# Altium PCB ECTU_PCB.PcbDoc (part 1 of 3)
Units mm, origin at the board's own origin, x right, y up, seen from the top; angles counter-clockwise.
Board outline 155 x 102 mm, 4 copper layers (Top Layer, Mid Top, Mid Bottom, Bottom Layer), stack 0.603 mm thick; 266 components, 187 nets, 917 pads, 241 vias.
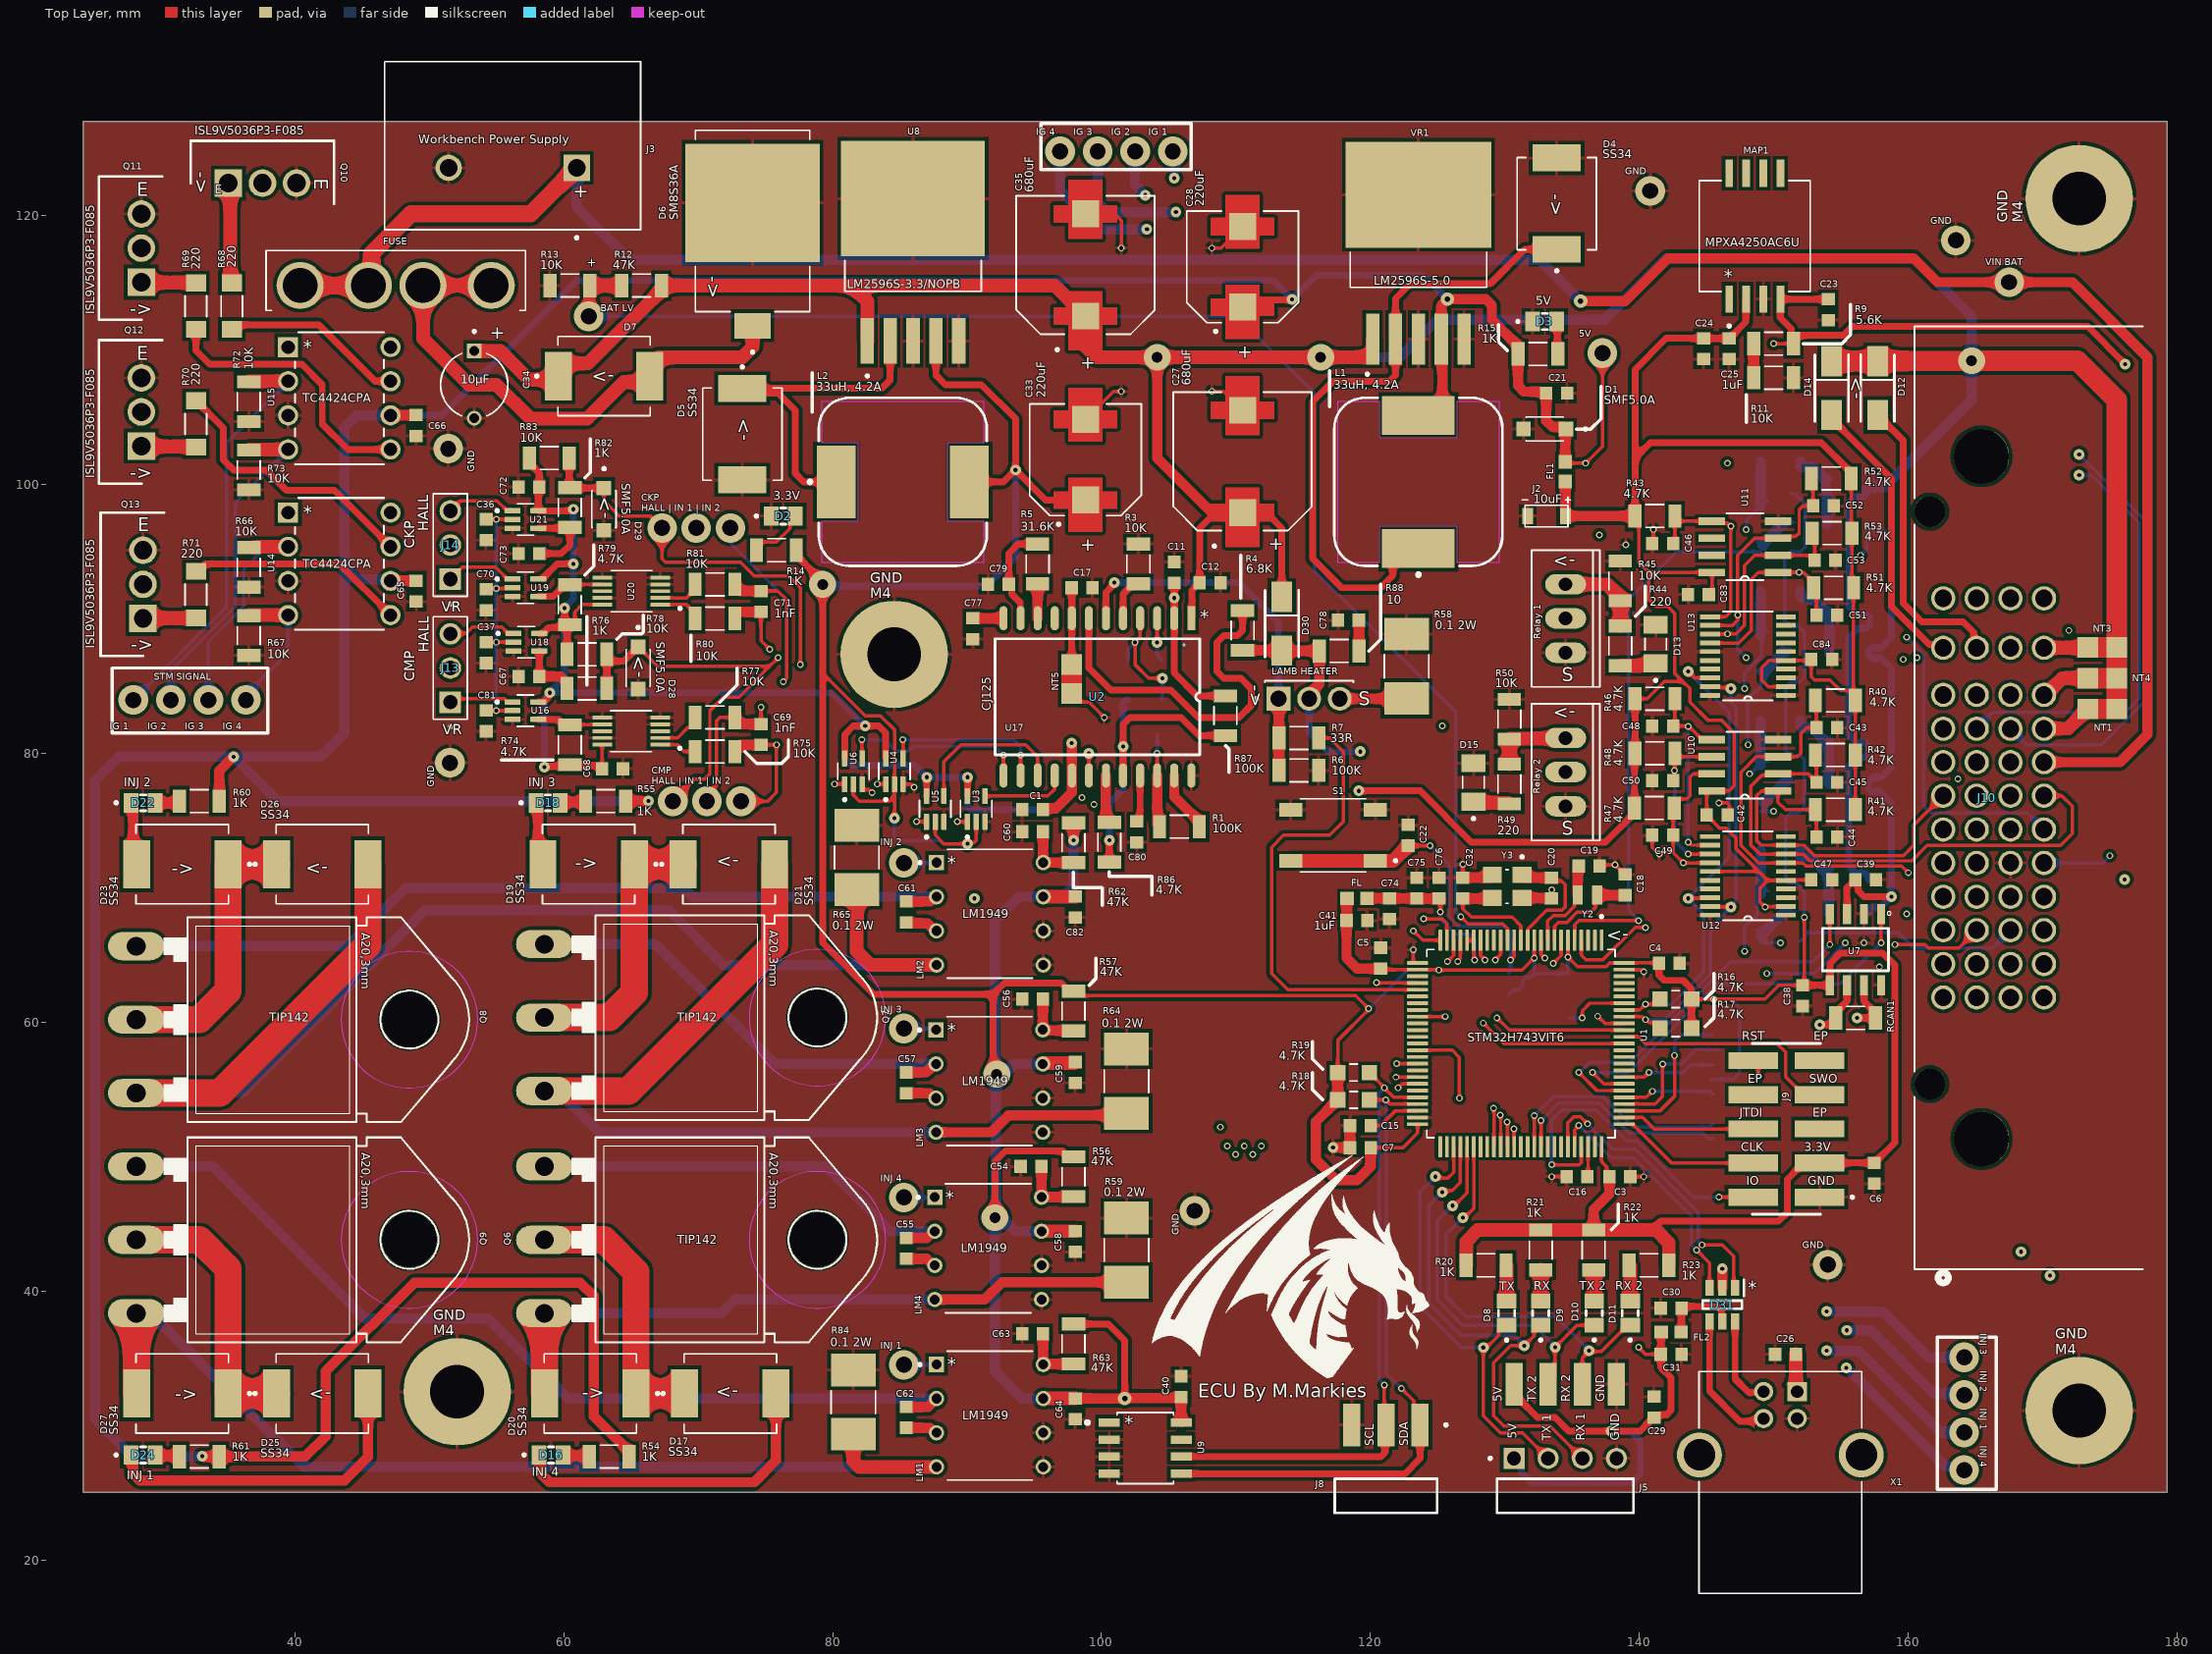
[diagram p0: Top Layer view]
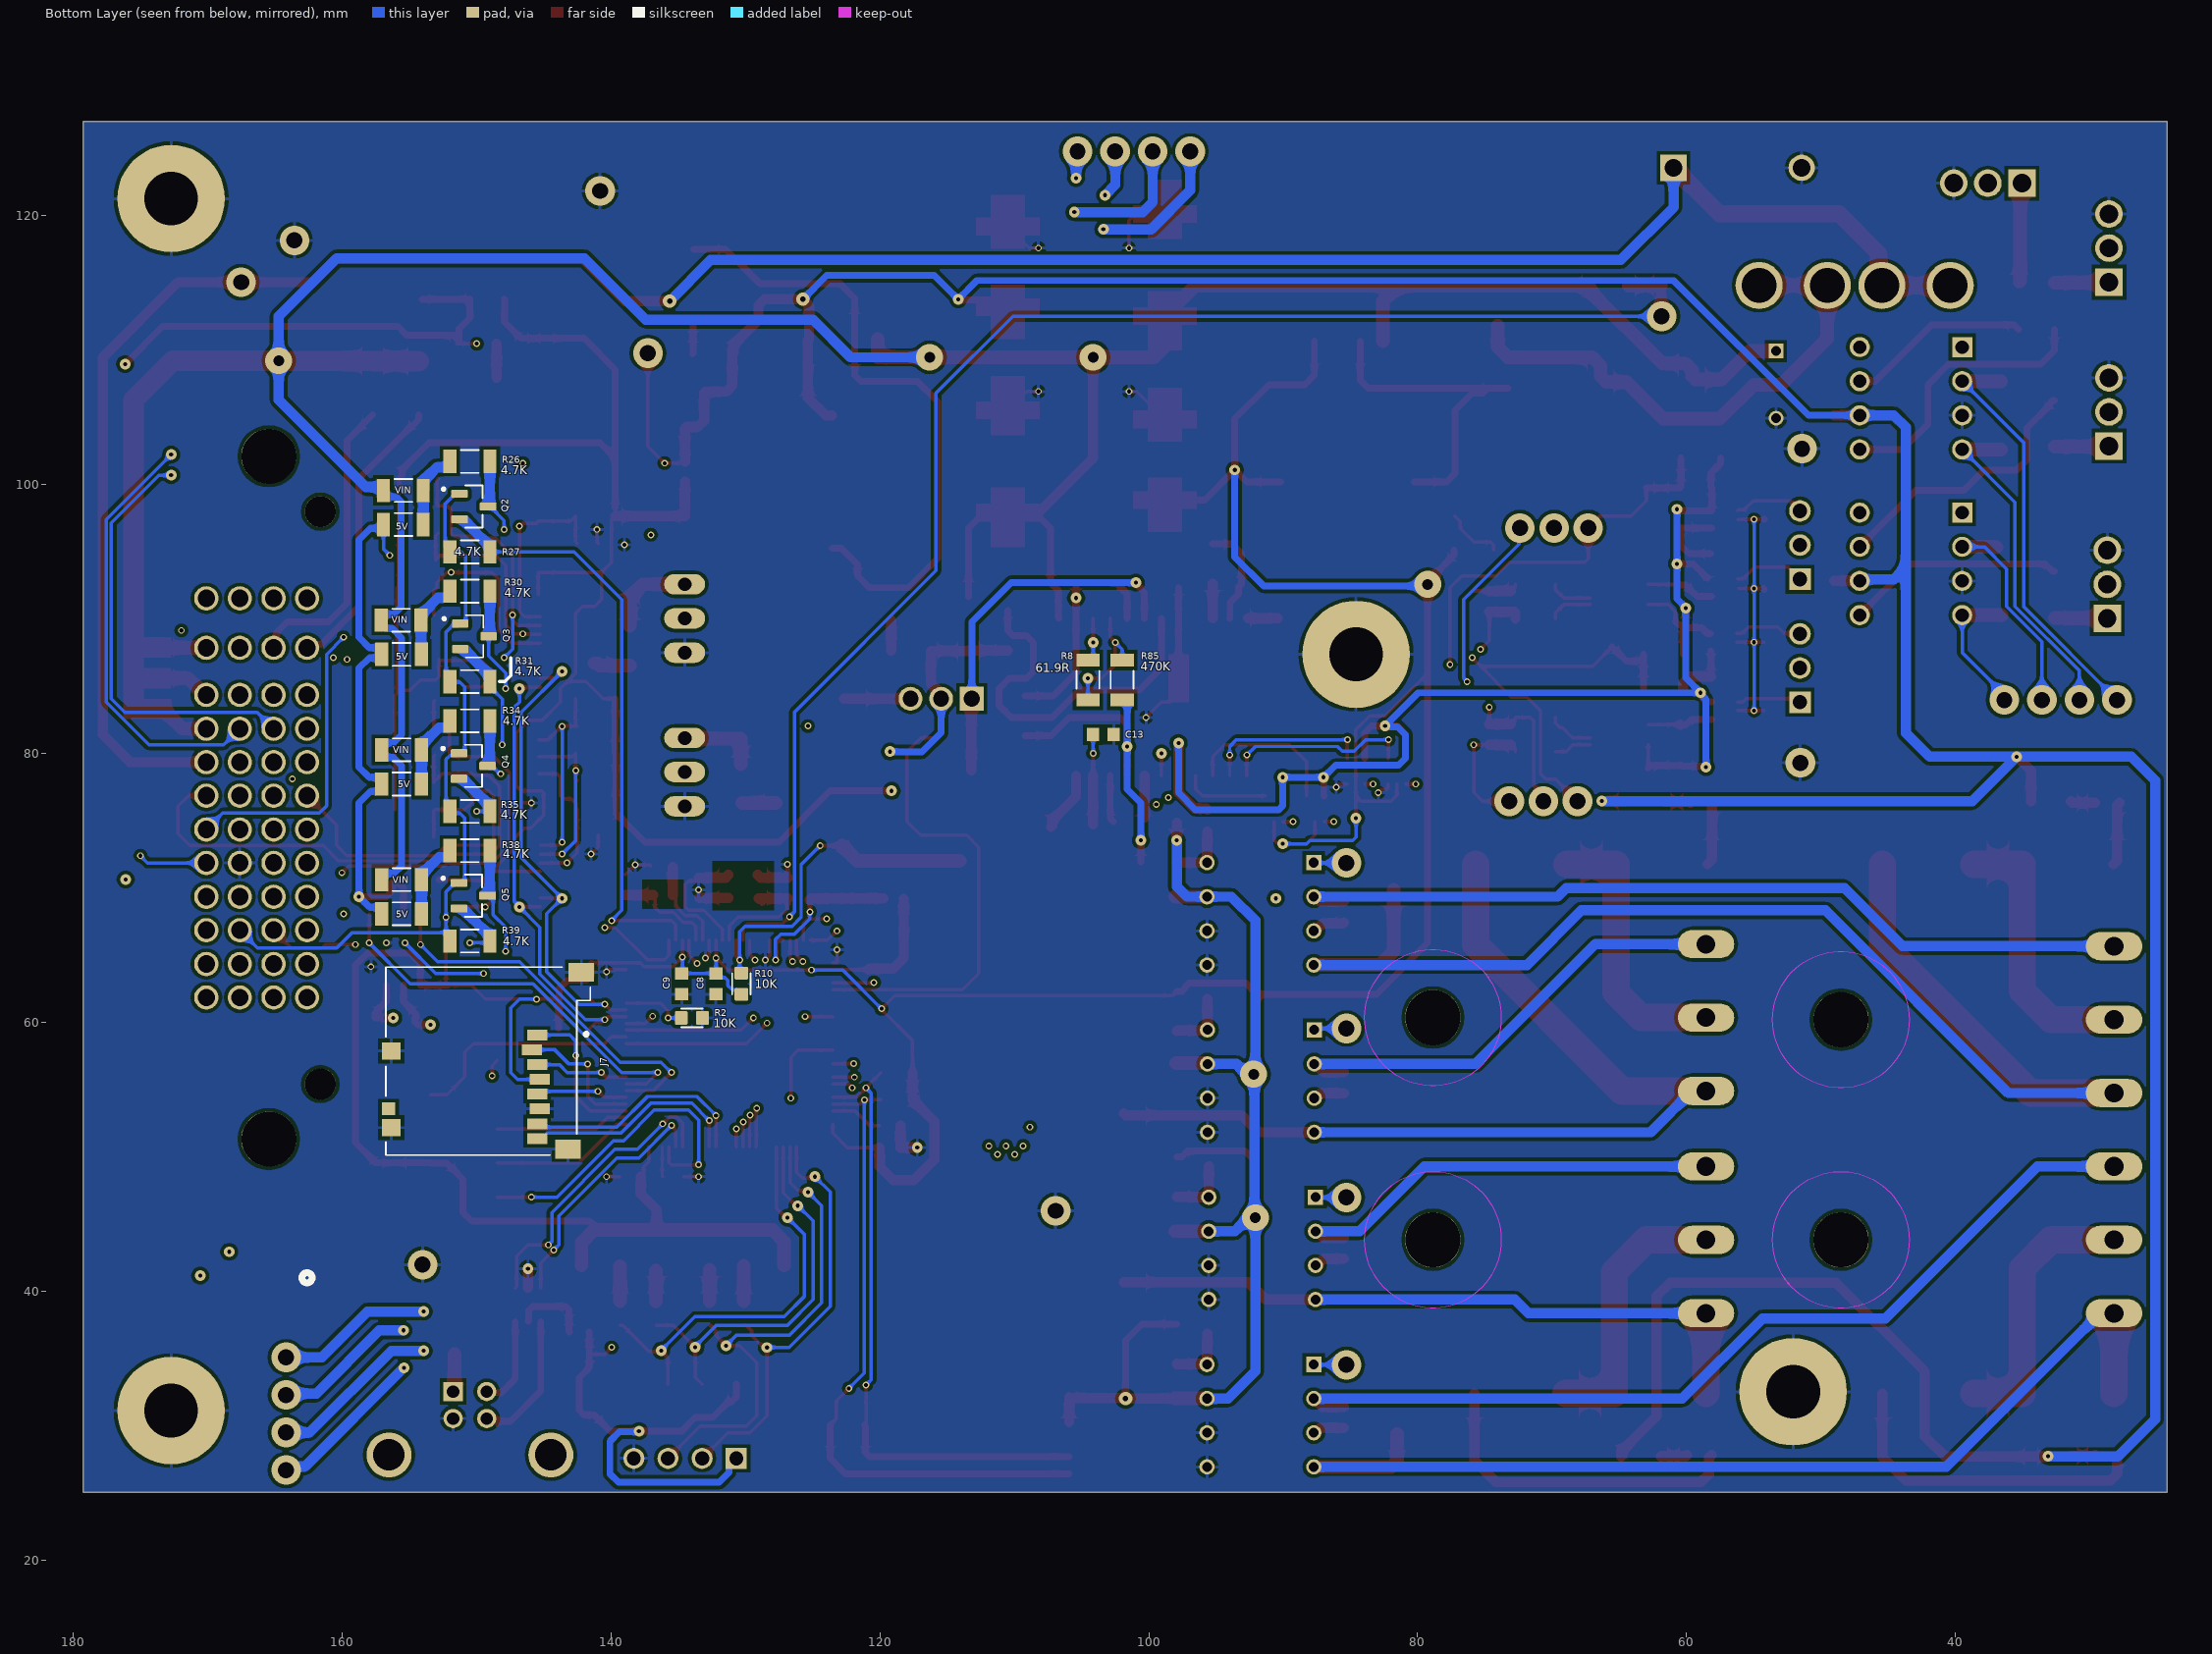
[diagram p1: Bottom Layer view, seen from below]
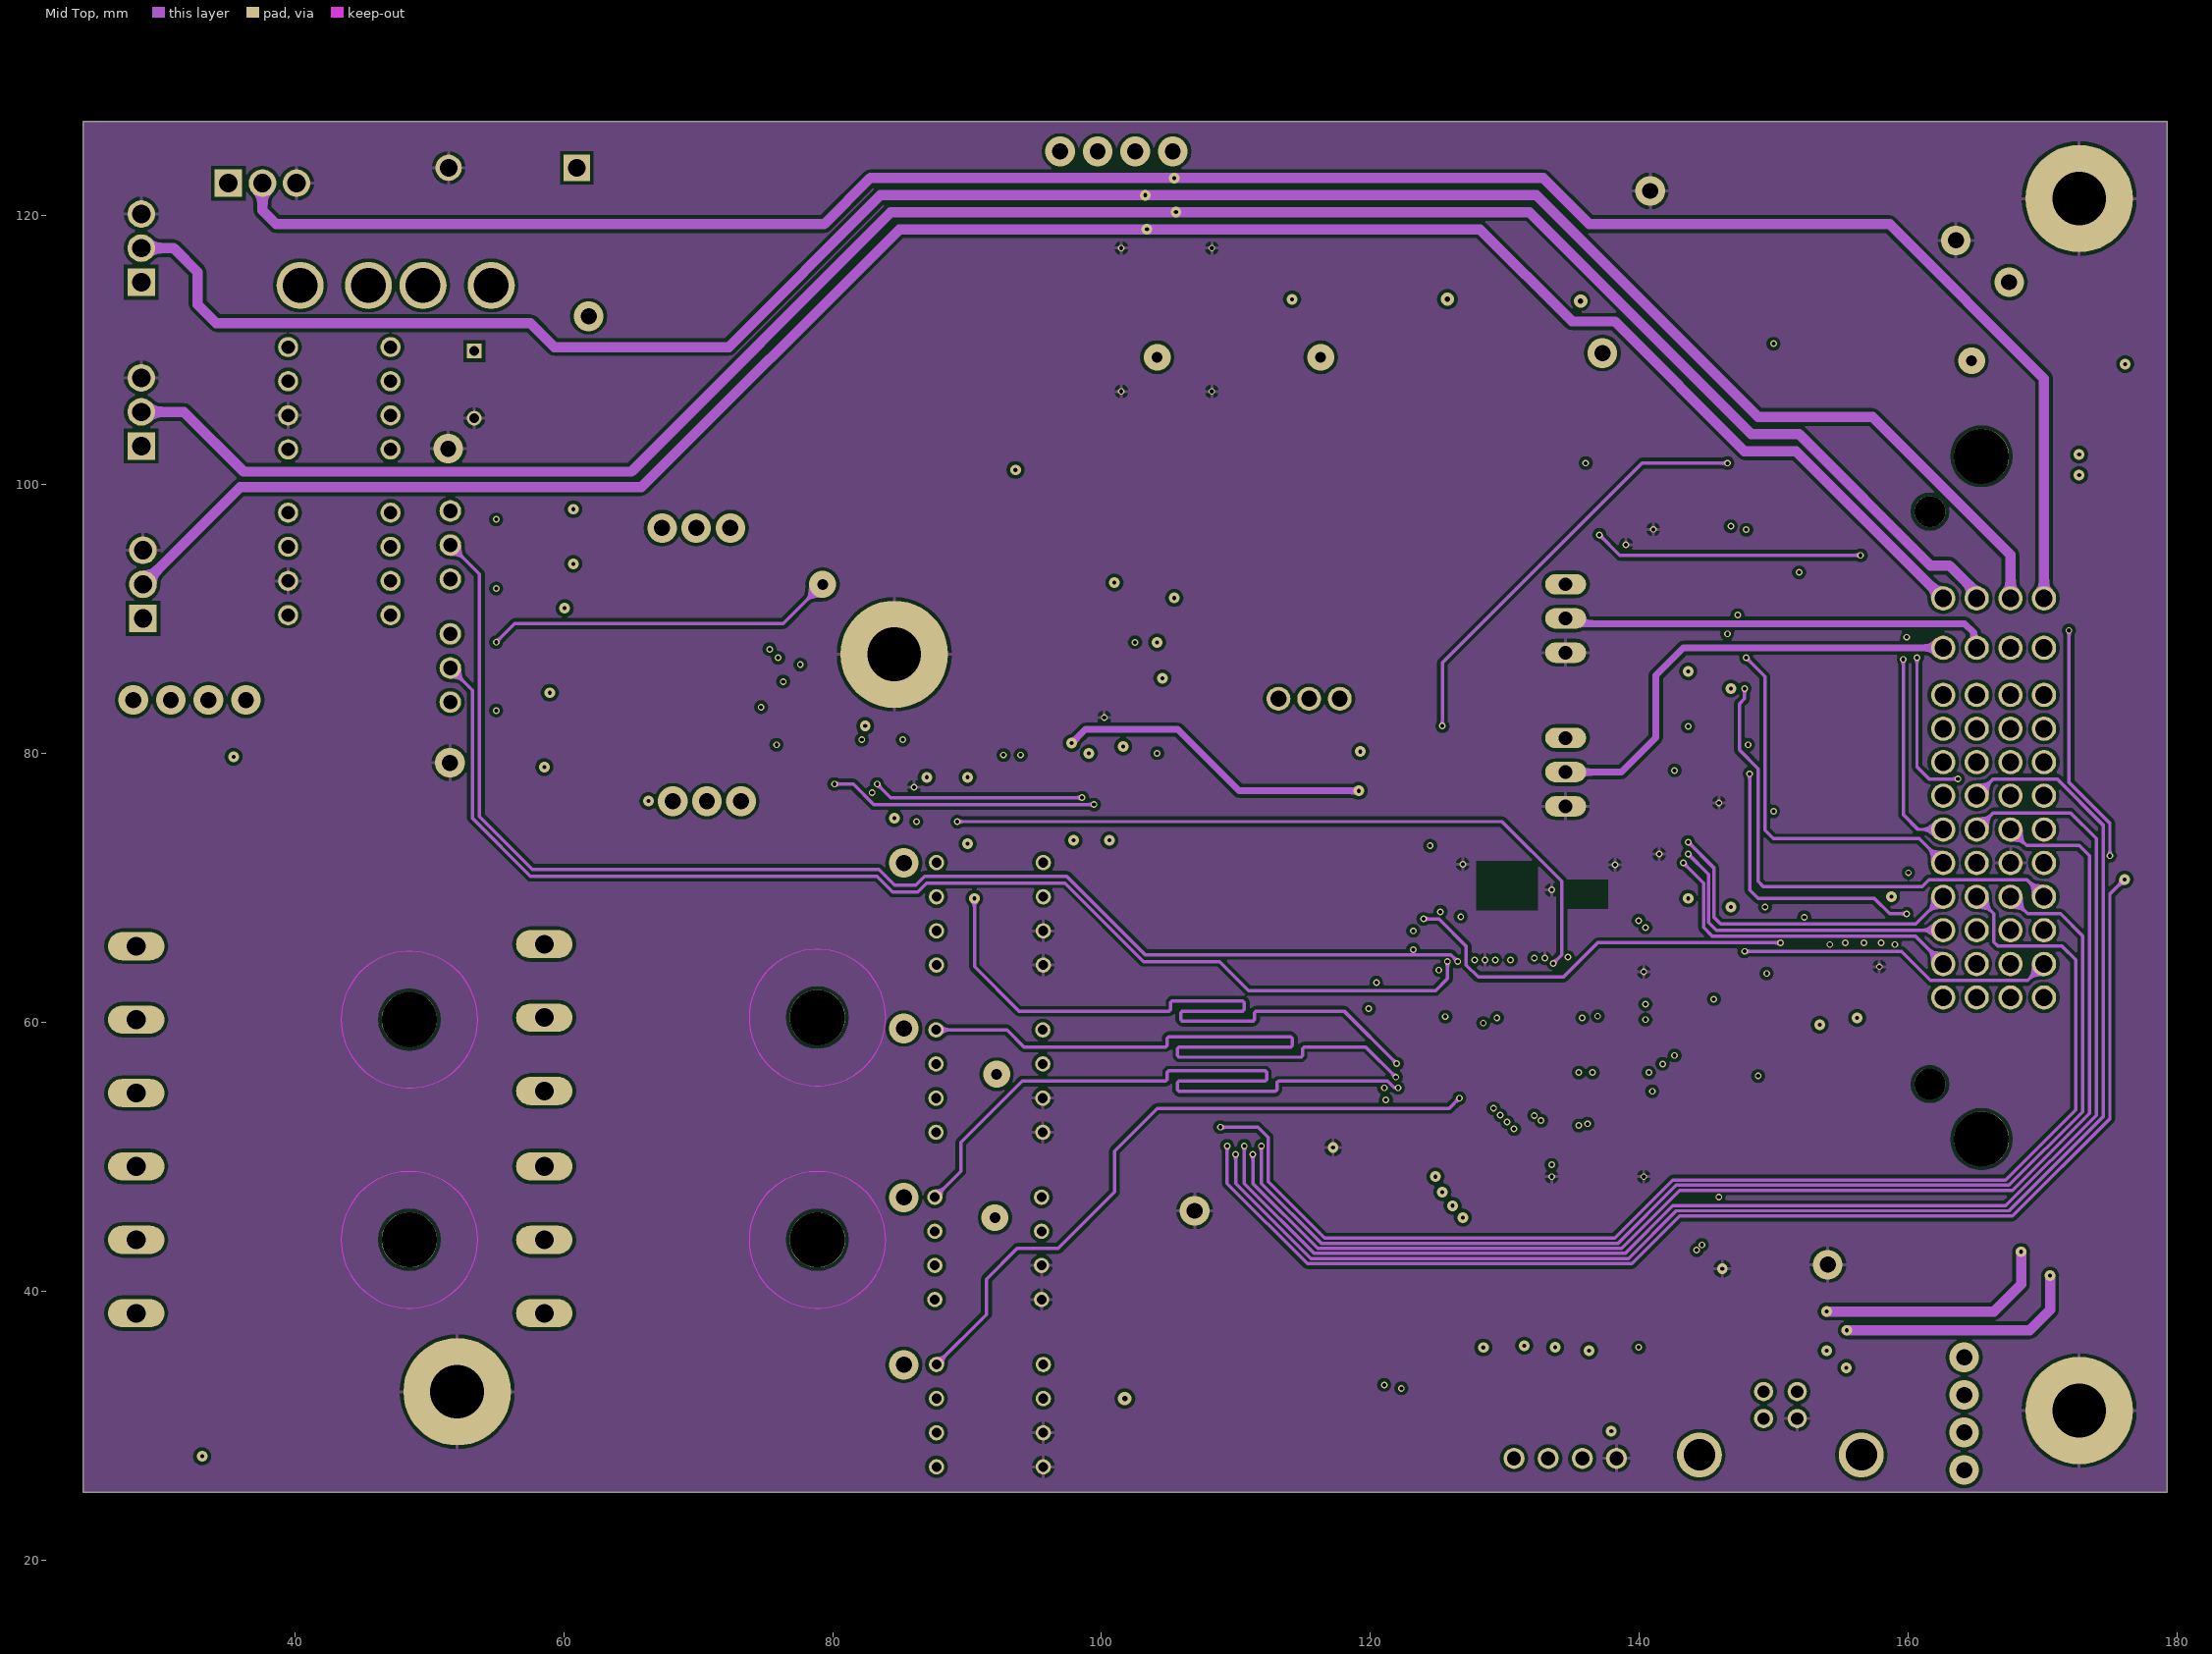
[diagram p2: Mid Top]
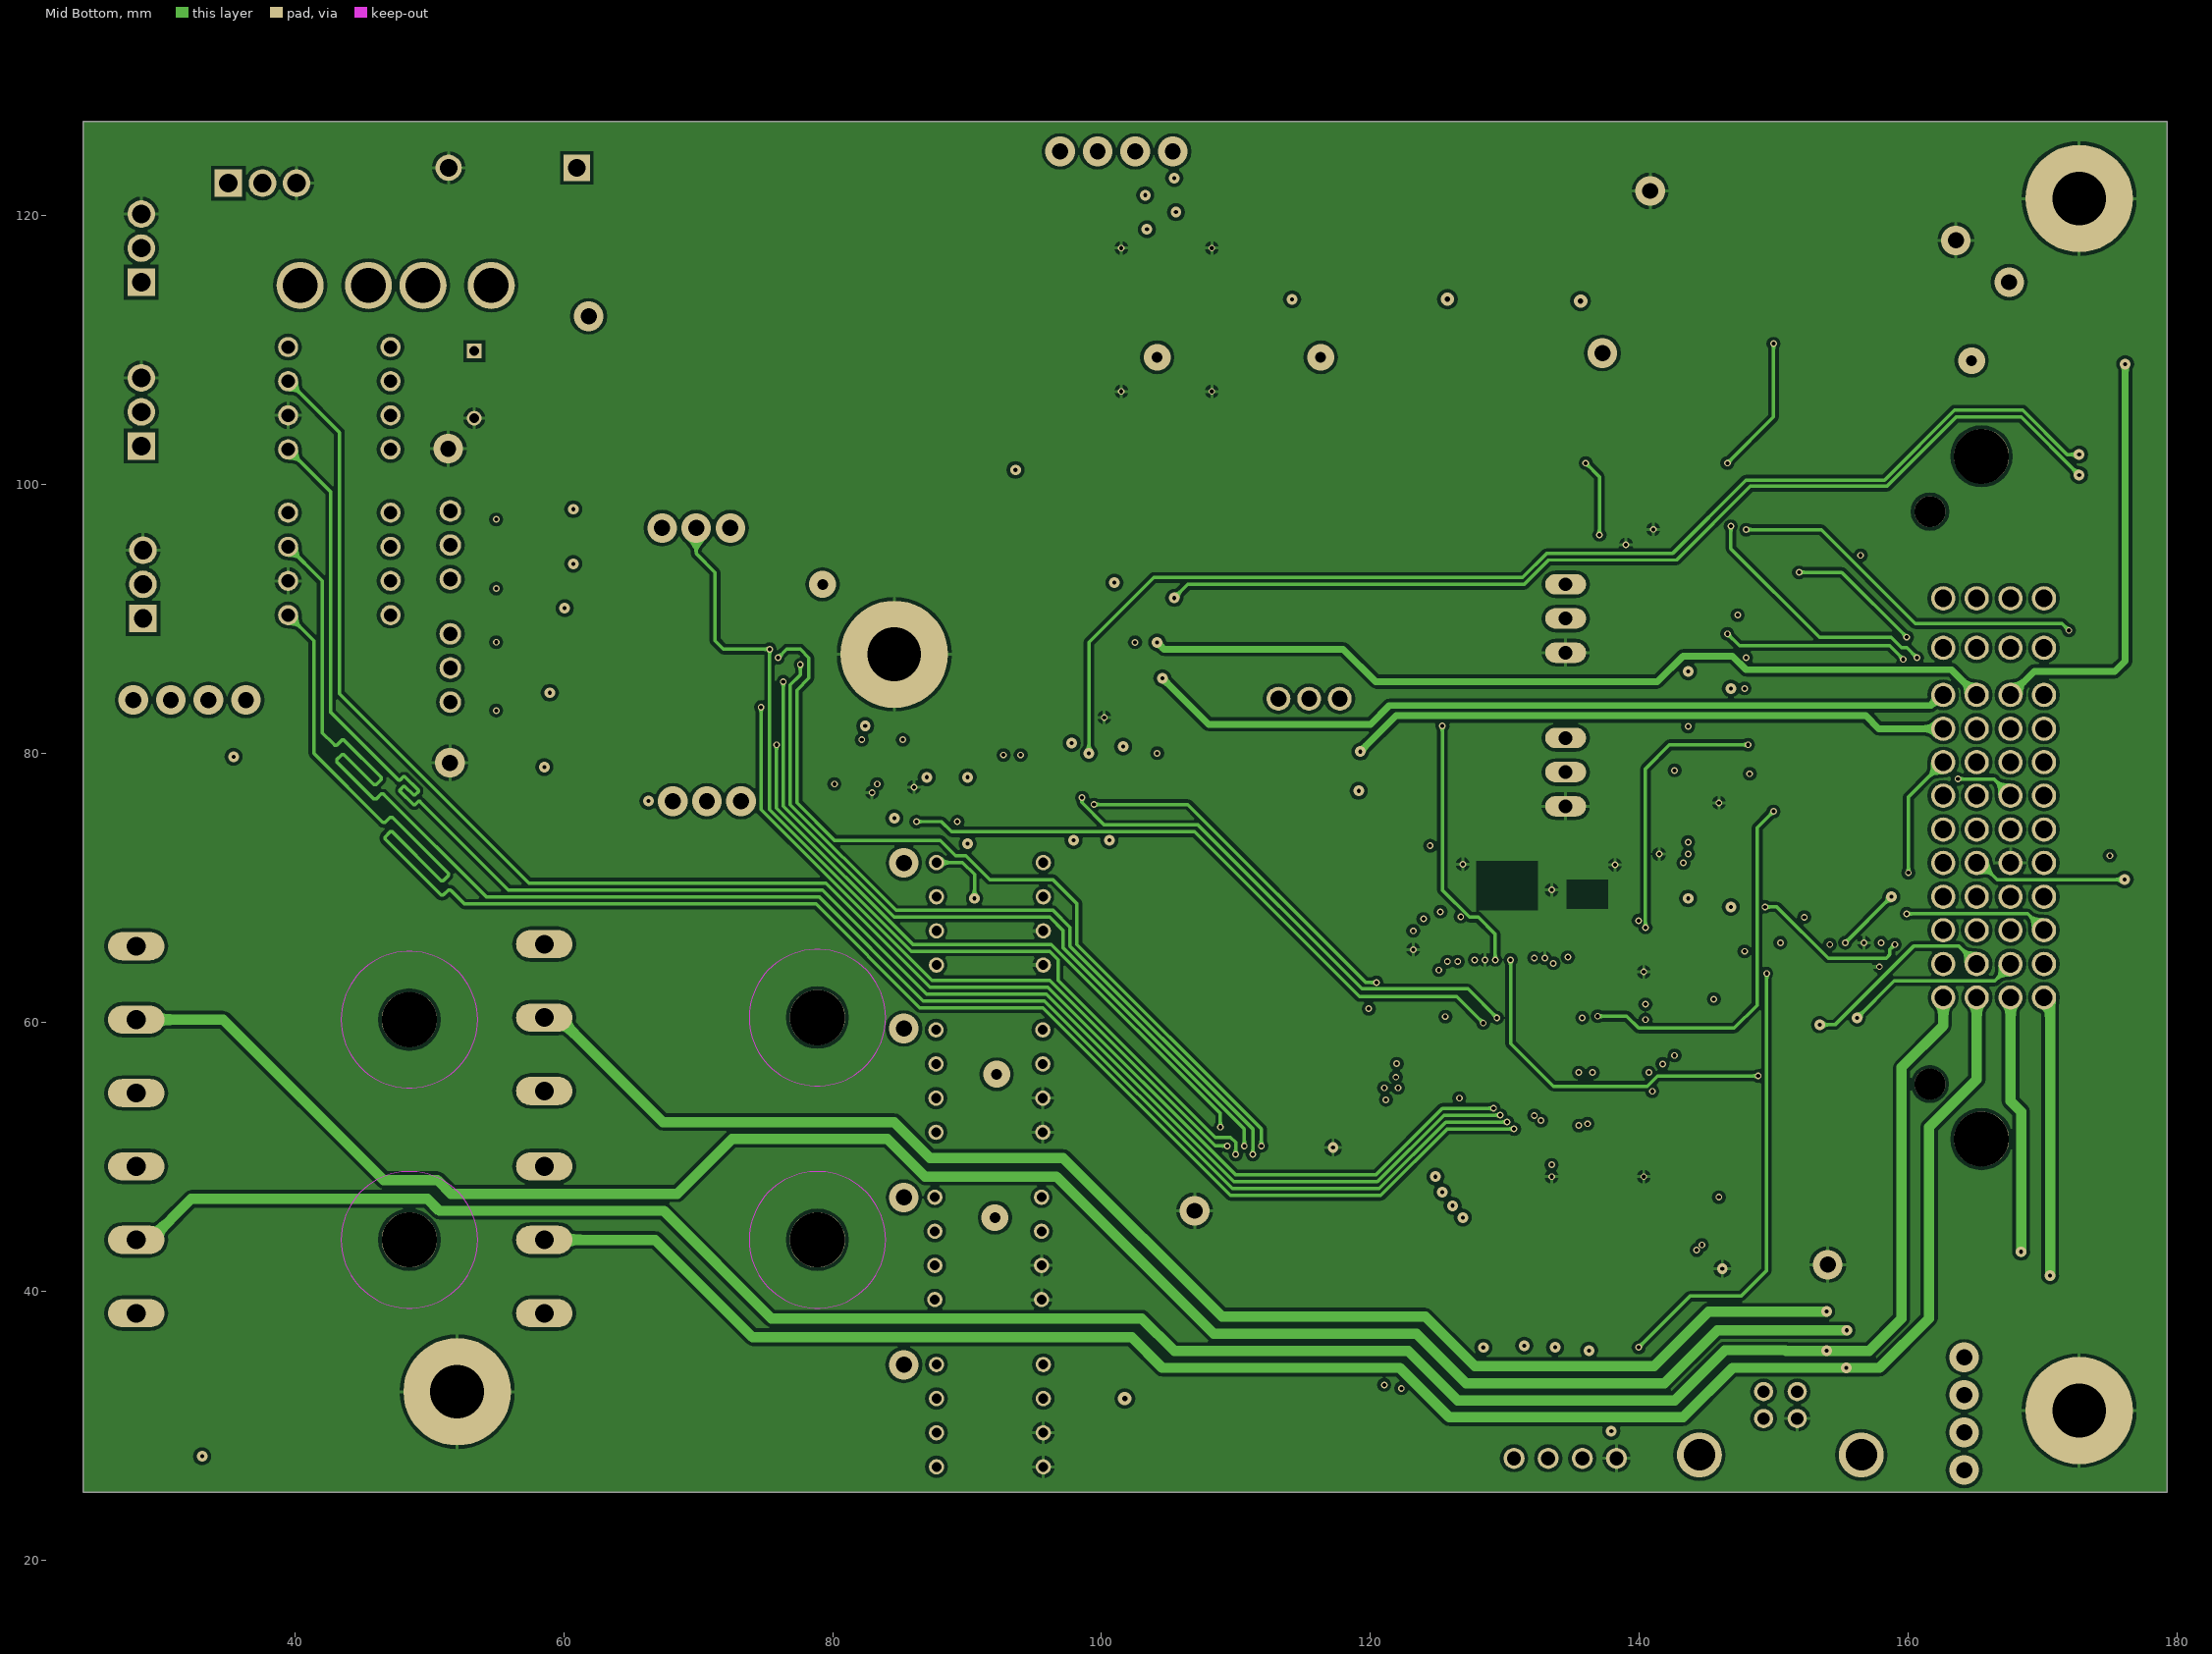
[diagram p3: Mid Bottom]
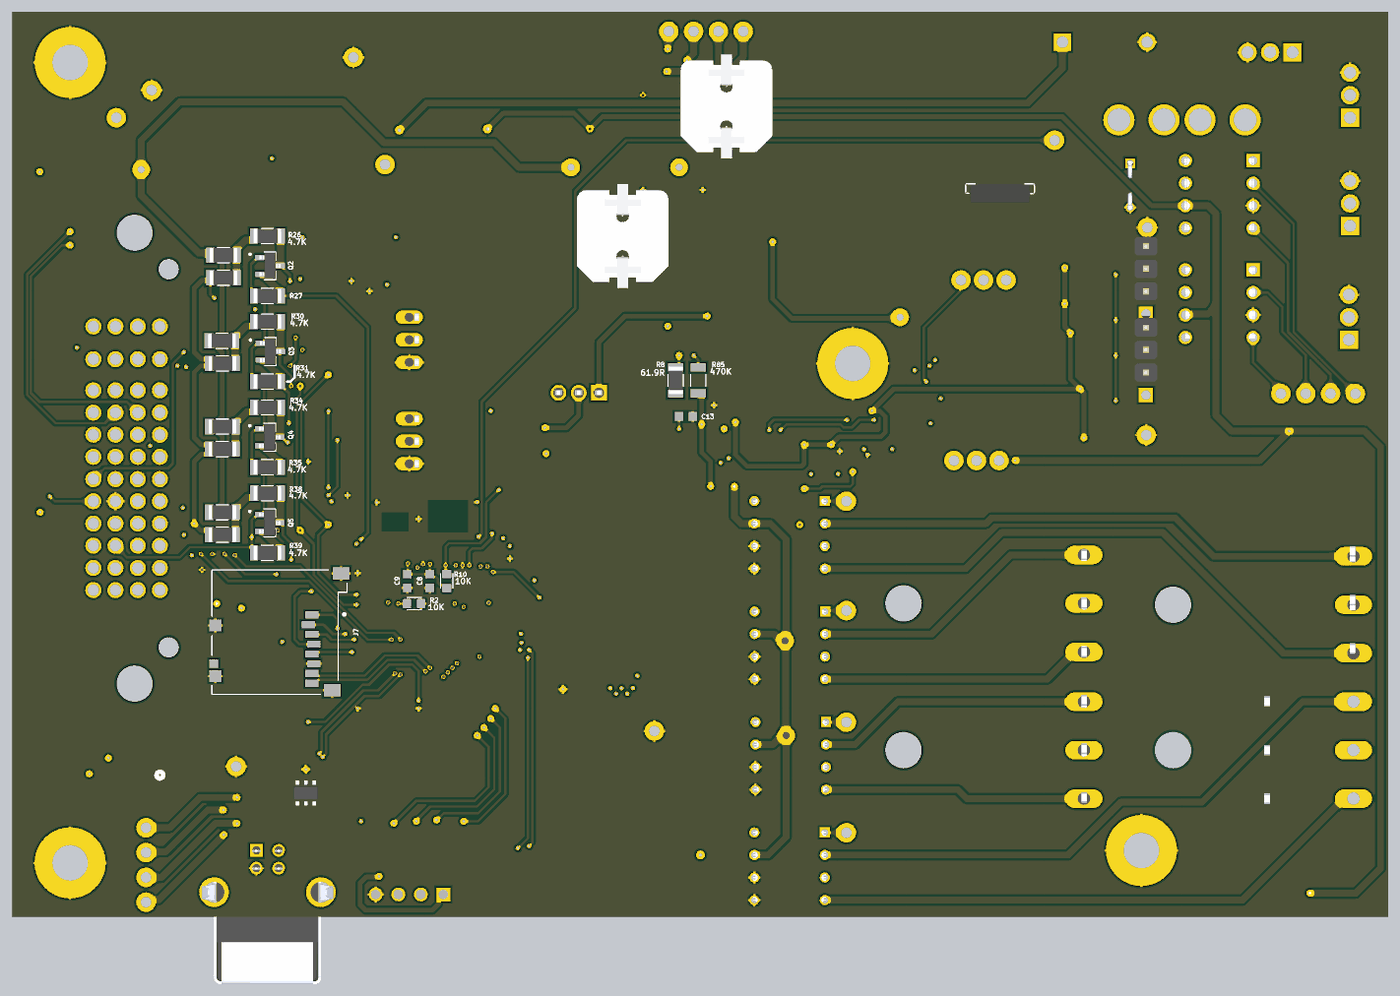
[diagram p6: 3D render of the assembled board from below, using the file's embedded part models]

## Layer stack, top to bottom
Top Solder: solder mask 0.0102, Solder Resist, Dk 3.5
Top Layer: signal copper 0.035
Dielectric 2: prepreg 0.0711, PP-006, Dk 4.1
Mid Top: signal copper 0.0356
Dielectric 1: dielectric 0.32, FR-4, Dk 4.8
Mid Bottom: signal copper 0.0356
Dielectric 3: prepreg 0.0711, PP-006, Dk 4.1
Bottom Layer: signal copper 0.035
Bottom Solder: solder mask 0.0102, Solder Resist, Dk 3.5

## Board outline
24.257,25.019 24.257,127.019 179.257,127.019 179.257,25.019

## Design rules (kind name [scope] priority, off if disabled: settings)
Clearance Clearance_Signal [InNetClass('Signal') vs InNetClass('Signal')] p1: gap=0.12 ignorepadtopadclearanceinfootprint=FALSE except(0: Arc-Hole Track-Hole SMDPad-Hole THPad-Hole Via-Hole Fill-Hole Poly-Hole Region-Hole Text-Hole)
Clearance Clearance_Global [All] p2: gap=0.254 ignorepadtopadclearanceinfootprint=FALSE except(0: Arc-Hole Track-Hole SMDPad-Hole THPad-Hole Via-Hole Fill-Hole Poly-Hole Region-Hole Text-Hole)
PolygonConnect [All] p1: connectstyle=Relief reliefconductorwidth=0.254 reliefentries=4 polygonreliefangle="90 Angle" airgapwidth=0.254
RoomDefinition Outputs_Sensors_And_ECUConnector [InComponentClass('Outputs_Sensors_And_ECUConnector')] p1: confinementstyle=ConfineIn formatcopy=TRUE lockcomponents=FALSE outline 0,0 50.8,0 50.8,25.4 0,25.4
RoomDefinition Ignition_Injector [InComponentClass('Ignition_Injector')] p2: confinementstyle=ConfineIn formatcopy=TRUE lockcomponents=FALSE outline 0,0 50.8,0 50.8,25.4 0,25.4
RoomDefinition ECU_Sheet [InComponentClass('ECU_Sheet')] p3: confinementstyle=ConfineIn formatcopy=TRUE lockcomponents=FALSE outline 0,0 50.8,0 50.8,25.4 0,25.4
RoomDefinition Communication_Interfaces [InComponentClass('Communication_Interfaces')] p4: confinementstyle=ConfineIn formatcopy=TRUE lockcomponents=FALSE outline 0,0 50.8,0 50.8,25.4 0,25.4
RoomDefinition CKP_CMP [InComponentClass('CKP_CMP')] p5: confinementstyle=ConfineIn formatcopy=TRUE lockcomponents=FALSE outline 0,0 50.8,0 50.8,25.4 0,25.4
RoutingVias RoutingVias_1 [InNet('GND')] p1: holewidth=0.711 width=1.27 viastyle="Through Hole" minholewidth=0.1 minwidth=0.3 maxholewidth=8 maxwidth=10
RoutingVias RoutingVias_Signal [InNetClass('Signal')] p2: holewidth=0.3 width=0.5 viastyle="Through Hole" minholewidth=0.1 minwidth=0.3 maxholewidth=0.4 maxwidth=0.8
RoutingVias [All] p3: holewidth=0.4 width=0.8 viastyle="Through Hole" minholewidth=0.3 minwidth=0.5 maxholewidth=0.711 maxwidth=1.27
SolderMaskExpansion [All] p1: expansion=0.102 istentingtop=FALSE
Width Width_Load [InNetClass('Load')] p1: maxlimit=0.254 minlimit=0.254 preferedwidth=0.254
Width Width_Signal [InNetClass('Signal')] p2: maxlimit=0.508 minlimit=0.12 preferedwidth=0.254 minimp=50.000000 maximp=50.000000 favimp=50.000000
Width Width_Power [InNetClass('Power')] p3: maxlimit=1.016 minlimit=0.254 preferedwidth=0.508 minimp=50.000000 maximp=50.000000 favimp=50.000000
Width Width_Global [All] p4: maxlimit=0.762 minlimit=0.254 preferedwidth=0.508 minimp=50.000000 maximp=50.000000 favimp=50.000000 checkconnectedcopper=TRUE
30 further rules are at their usual default settings.

## Classes and differential pairs
component class ECU_Sheet: C1 C3 C4 C5 C6 C7 C8 C9 C11 C12 C13 C15 C16 C17 C18 C19 C20 C21 C22 C23 C24 C25 C32 C41 C74 C75 C76 C77 C78 C79 C80 D1 D30 FL FL1 J2 "LAMB HEATER" MAP1 NT1 NT5 R1 R2 R3 R4 R5 R6 R7 R8 R9 R10 R11 R12 R13 R58 R85 R86 R87 R88 S1 U1 U2 U3 U4 U5 U6 Y2 Y3
component class CKP_CMP: C36 C37 C67 C68 C69 C70 C71 C72 C73 C81 D28 D29 J13 J14 R74 R75 R76 R77 R78 R79 R80 R81 R82 R83 U16 U17 U18 U19 U20 U21
component class Outputs_Sensors_And_ECUConnector: 5V C42 C43 C44 C45 C46 C47 C48 C49 C50 C51 C52 C53 C83 C84 D12 D13 D14 D15 J10 NT3 NT4 Q2 Q3 Q4 Q5 R26 R27 R30 R31 R34 R35 R38 R39 R40 R41 R42 R43 R44 R45 R46 R47 R48 R49 R50 R51 R52 R53 "Relay 1" "Relay 2" U10 U11 U12 U13 VIN
component class Ignition_Injector: C54 C55 C56 C57 C58 C59 C60 C61 C62 C63 C64 C65 C66 C82 D16 D17 D18 D19 D20 D21 D22 D23 D24 D25 D26 D27 LM1 LM2 LM3 LM4 Q6 Q7 Q8 Q9 Q10 Q11 Q12 Q13 R54 R55 R56 R57 R59 R60 R61 R62 R63 R64 R65 R66 R67 R68 R69 R70 R71 R72 R73 R84 U14 U15
component class Communication_Interfaces: C26 C27 C28 C29 C30 C31 C33 C34 C35 C38 C39 C40 D2 D3 D4 D5 D6 D7 D8 D9 D10 D11 D31 FL2 FUSE J3 J5 J7 J8 J9 L1 L2 L? "MASTER SWD?" R14 R15 R16 R17 R18 R19 R20 R21 R22 R23 RCAN1 U7 U8 U9 VR1 VR? X1

## Components (designator, comment, footprint, x,y, rotation, side; value= is the part's Value field where it differs from the comment)
5V "0" RESC3116X65N#1 155.575,77.724 r0 bottom (schematic designator R32)
5V "0" RESC3116X65N#1 155.448,97.028 r0 bottom (schematic designator R24)
5V "0" RESC3116X65N#1 155.575,68.072 r0 bottom (schematic designator R36)
5V "0" RESC3116X65N#1 155.575,87.376 r0 bottom (schematic designator R28)
C1 "0.1µF" CAPC1608X90N 94.869,75.819 r0 top
C3 "0.1µF" CAPC1608X90N 138.557,48.514 r0 top
C4 "0.1µF" CAPC1608X90N 142.24,64.389 r0 top
C5 "0.1µF" CAPC1608X90N 120.777,64.77 r90 top
C6 "0.1uF" CAPC1608X90N 157.48,48.768 r270 top
C7 "0.1µF" CAPC1608X90N 119.253,50.673 r180 top
C8 "0.1µF" CAPC1608X90N 132.207,62.865 r270 bottom
C9 "0.1µF" CAPC1608X90N 134.747,62.865 r270 bottom
C11 "2.2nF" CAPC1608X90N 105.41,93.472 r90 top
C12 "0.1µF" CAPC1608X90N 108.077,92.71 r180 top
C13 "0.1µF" CAPC1608X90N 103.378,81.407 r0 bottom
C15 "2.2µF" CAPC1608X90N 119.253,52.324 r0 top
C16 "2.2µF" CAPC1608X90N 135.369,48.514 r0 top
C17 "0.1µF" CAPC1608X90N 98.552,92.329 r0 top
C18 "16pF" CAPC1608X90N 138.938,70.231 r270 top
C19 "16pF" CAPC1608X90N 136.271,71.628 r180 top
C20 "22pF" CAPC1608X90N 133.477,69.977 r90 top
C21 "0.1uF" CAPC1608X90N 133.858,106.807 r180 top
C22 "0.1µF" CAPC1608X90N 122.809,73.914 r270 top
C23 "0.1µF" CAPC1608X90N 154.051,113.017 r90 top
C24 "0.1µF" CAPC1608X90N 144.78,110.109 r90 top
C25 "1uF" CAPC1608X90N 146.685,110.109 r90 top
C26 "0.1uF" CAPC1608X90N 150.876,35.306 r180 top
C27 "680uF" CAP_EEEFN1E681UV 110.49,101.727 r90 top
C28 "220uF" CAP_EEEFP1V221AV 110.49,116.205 r90 top
C29 "0.1µF" CAPC1608X90N 141.097,31.369 r270 top
C30 "10nF" CAPC1608X90N 142.367,38.735 r180 top
C31 "0.1uF" CAPC1608X90N 142.367,35.306 r0 top
C32 "22pF" CAPC1608X90N 126.873,69.977 r270 top
C33 "220uF" CAP_EEEFP1V221AV 98.806,101.854 r90 top
C34 "10µF" CAPPRD500W50D500H1100 53.34,107.442 r270 top
C35 "680uF" CAP_EEEFN1E681UV 98.806,116.342 r90 top
C36 "0.1µF" CAPC1608X90N 54.229,96.647 r90 top
C37 "0.1µF" CAPC1608X90N 54.229,87.503 r90 top
C38 "0.1µF" CAPC1608X90N 152.146,61.976 r90 top
C39 "0.1µF" CAPC1608X90N 156.845,70.612 r180 top
C40 "0.1µF" CAPC1608X90N 105.918,32.893 r270 top
C41 "1uF" CAPC1608X90N 118.999,67.564 r0 top
C42 "0.1µF" CAPC1608X90N 145.796,75.438 r180 top
C43 "0.1µF" CAPC1608X90N 153.949,81.915 r180 top
C44 "0.1µF" CAPC1608X90N 153.949,73.787 r180 top
C45 "0.1µF" CAPC1608X90N 153.949,77.851 r180 top
C46 "0.1µF" CAPC1608X90N 141.744,95.631 r0 top
C47 "0.1µF" CAPC1608X90N 153.568,70.612 r180 top
C48 "0.1µF" CAPC1608X90N 141.744,82.042 r0 top
C49 "0.1µF" CAPC1608X90N 141.744,73.914 r0 top
C50 "0.1µF" CAPC1608X90N 141.744,77.978 r0 top
C51 "0.1µF" CAPC1608X90N 153.949,90.297 r180 top
C52 "0.1µF" CAPC1608X90N 153.695,98.425 r180 top
C53 "0.1µF" CAPC1608X90N 153.822,94.361 r180 top
C54 "0.1µF" CAPC1608X90N 94.755,49.276 r180 top
C55 "0.1µF" CAPC1608X90N 85.471,43.18 r90 top
C56 "0.1µF" CAPC1608X90N 94.869,61.722 r180 top
C57 "0.1µF" CAPC1608X90N 85.471,55.499 r90 top
C58 "0.1µF" CAPC1608X90N 98.044,43.688 r90 top
C59 "0.1µF" CAPC1608X90N 98.044,56.261 r90 top
C60 "0.1µF" CAPC1608X90N 94.869,74.168 r180 top
C61 "0.1µF" CAPC1608X90N 85.471,68.212 r90 top
C62 "0.1µF" CAPC1608X90N 85.471,30.607 r90 top
C63 "0.1µF" CAPC1608X90N 94.869,36.83 r180 top
C64 "0.1µF" CAPC1608X90N 98.044,31.242 r90 top
C65 "0.1uF" CAPC1608X90N 49.022,92.075 r90 top
C66 "0.1uF" CAPC1608X90N 49.022,104.394 r90 top
C67 "10nF" CAPC1608X90N 57.404,85.725 r0 top
C68 "0.1uF" CAPC1608X90N 63.627,78.867 r180 top
C69 "1nF" CAPC1608X90N 74.676,81.407 r270 top
C70 "0.1µF" CAPC1608X90N 54.229,91.44 r90 top
C71 "1nF" CAPC1608X90N 74.676,91.313 r270 top
C72 "0.1uF" CAPC1608X90N 57.404,99.822 r0 top
C73 "10nF" CAPC1608X90N 57.404,94.869 r0 top
C74 "0.1µF" CAPC1608X90N 121.412,68.453 r270 top
C75 "1µF" CAPC1608X90N 123.444,69.977 r90 top
C76 "0.1µF" CAPC1608X90N 125.095,69.977 r90 top
C77 "33nF" CAPC1608X90N 90.424,89.281 r270 top
C78 "100nF/100V" CAPC1608X90N 118.364,89.916 r180 top
C79 "0.1µF" CAPC1608X90N 92.329,92.583 r180 top
C80 "33nF" CAPC1608X90N 102.616,74.168 r270 top
C81 "0.1µF" CAPC1608X90N 54.229,82.423 r90 top
C82 "0.1µF" CAPC1608X90N 98.044,68.58 r90 top
C83 "0.1µF" CAPC1608X90N 144.399,91.821 r0 top
C84 "0.1µF" CAPC1608X90N 153.568,86.995 r180 top
D1 "SMF5.0A" SODFL3718X102N 132.969,104.14 r180 top
D2 "3.3V" LEDC2012X70N 76.327,97.663 r0 top
D3 "5V" LEDC2012X70N 132.969,112.141 r0 top
D4 "SS34" DIO_SS34#1 133.858,120.904 r90 top
D5 "SS34" DIO_SS34#1 73.279,103.759 r270 top
D6 "SM8S36A" TVSP_SM8S36A 74.041,118.618 r90 top
D7 "SS34" DIO_SS34#2 62.992,108.077 r0 top
D8 "TX" LEDC2012X70N 130.129,38.354 r90 top
D9 "RX" LEDC2012X70N 132.669,38.365 r90 top
D10 "TX 2" LEDC2012X70N 136.652,38.365 r90 top
D11 "RX 2" LEDC2012X70N 139.319,38.365 r90 top
D12 "SS54-HF" DIOM5025X220N 157.734,107.188 r270 top
D13 "BZT52C3V3_RHG" DIO_BZT52C3V3_RHG 141.224,88.138 r90 top
D14 "SS54-HF" DIOM5025X220N 154.305,107.188 r270 top
D15 "BZT52C3V3_RHG" DIO_BZT52C3V3_RHG 127.667,77.851 r90 top
D16 "INJ 4" LEDC2012X70N 59.055,27.813 r0 top
D17 "SS34" DIO_SS34#1 72.39,32.385 r0 top
D18 "INJ 3" LEDC2012X70N 58.825,76.327 r0 top
D19 "SS34" DIO_SS34#1 61.849,71.755 r180 top
D20 "SS34" DIO_SS34#1 61.976,32.385 r180 top
D21 "SS34" DIO_SS34#1 72.287,71.755 r0 top
D22 "INJ 2" LEDC2012X70N 28.702,76.327 r0 top
D23 "SS34" DIO_SS34#1 31.623,71.755 r180 top
D24 "INJ 1" LEDC2012X70N 28.702,27.813 r0 top
D25 "SS34" DIO_SS34#1 42.037,32.385 r0 top
D26 "SS34" DIO_SS34#1 42.037,71.755 r0 top
D27 "SS34" DIO_SS34#1 31.623,32.385 r180 top
D28 "SMF5.0A" SODFL3718X102N 65.532,86.36 r270 top
D29 "SMF5.0A" SODFL3718X102N 62.992,98.171 r270 top
D30 "SS54-HF" DIOM5025X220N 113.411,89.662 r270 top
D31 "USBLC6-2SC6Y" SOT95P280X145-6N 146.177,38.989 r270 top
FL "600/100MHz" BEADC1608X95N 118.999,69.215 r0 top
FL1 "600/100MHz" BEADC1608X95N 134.493,100.965 r270 top
FL2 "600/100MHz" BEADC1608X95N 142.367,36.957 r180 top
FUSE "Fuse" FUSE_3522-2 47.498,115.189 r180 top (schematic designator X2)
J2 "10uF" T491A106K010AT 134.699,98.463 r180 top
J3 "Workbench Power Supply" TE_796739-2 56.2,123.571 r180 top
J5 "TSM-104-01-L-MT" SAMTEC_TSM-104-01-L-MT 134.493,27.559 r180 top
J7 "47352-1001" MOLEX_47352-1001 149.148,57.113 r90 bottom
J8 "TSM-103-01-L-SH" SAMTEC_TSM-103-01-L-SH 121.158,24.765 r180 top
J9 "TSM-105-01-LM-DV-P-TR" SAMTEC_TSM-105-01-LM-DV-P-TR 150.941,52.07 r270 top
J10 "5007620483" CONN_SD-500762-001_MOL 162.611,61.849 r90 top locked
J13 "M20-9990345" HARWIN_M20-9990345 51.562,86.36 r90 top
J14 "M20-9990345" HARWIN_M20-9990345 51.562,95.504 r90 top
L1 "33uH, 4.2A" WE-PD_1210 123.571,100.203 r0 top
L2 "33uH, 4.2A" WE-PD_1210 85.217,100.203 r270 top
"LAMB HEATER" "TSM4NB65CH_C5G" TO228P680X240X837-3 113.163,84.074 r0 top (schematic designator Q1)
LM1 "LM1949" DIP794W45P254L959H508Q8 91.694,30.734 r0 top
LM2 "LM1949" DIP794W45P254L959H508Q8 91.694,68.072 r0 top
LM3 "LM1949" DIP794W45P254L959H508Q8 91.661,55.626 r0 top
LM4 "LM1949" DIP794W45P254L959H508Q8 91.567,43.18 r0 top
MAP1 "MPXA4250AC6U" SOIC127P1041X990-8N 148.59,118.491 r90 top
NT1 "" NetTie 174.879,83.439 r0 top net-tie
NT3 "NT" NetTie 174.879,88.011 r0 top net-tie
NT4 "NT" NetTie 174.879,85.725 r0 top net-tie
NT5 "NT" NetTie 97.663,85.979 r90 top net-tie
Q2 "BSS138" SOT95P240X111-3N 150.205,98.372 r180 bottom
Q3 "BSS138" SOT95P240X111-3N 150.158,88.72 r180 bottom
Q4 "BSS138" SOT95P240X111-3N 150.241,79.068 r180 bottom
Q5 "BSS138" SOT95P240X111-3N 150.241,69.416 r180 bottom
Q6 "TIP142" SOT93#1 68.707,43.815 r270 top
Q7 "TIP142" SOT93#1 68.707,60.35 r270 top
Q8 "TIP142" SOT93#1 38.354,60.198 r270 top
Q9 "TIP142" SOT93#2 38.354,43.815 r270 top
Q10 "ISL9V5036P3-F085" *TO254P470X1016X2019-3P 35.052,122.428 r0 top
Q11 "ISL9V5036P3-F085" *TO254P470X1016X2019-3P 28.575,115.064 r90 top
Q12 "ISL9V5036P3-F085" *TO254P470X1016X2019-3P 28.575,102.873 r90 top
Q13 "ISL9V5036P3-F085" *TO254P470X1016X2019-3P 28.702,90.048 r90 top
R1 "100K" RESC3116X65N#1 105.791,74.549 r180 top
R2 "10K" RESC1608X50N 133.985,60.325 r0 bottom
R3 "10K" RESC3116X65N#1 102.743,94.107 r270 top
R4 "6.8K" RESC3116X65N#1 110.49,89.154 r90 top
R5 "31.6K" RESC3116X65N#1 95.25,94.107 r270 top
R6 "100K" RESC3116X65N#1 114.681,78.74 r0 top
R7 "33R" RESC3116X65N#1 114.681,81.153 r180 top
R8 "61.9R" RESC3116X65N#2 104.521,85.471 r90 bottom
R9 "5.6K" RESC3116X65N#1 149.987,110.49 r180 top
R10 "10K" RESC1608X50N 130.302,62.865 r90 bottom
R11 "10K" RESC3116X65N#1 149.987,107.95 r180 top
R12 "47K" RESC3116X65N#1 65.786,114.808 r180 top
R13 "10K" RESC3116X65N#1 60.452,114.808 r180 top
R14 "1K" RESC3116X65N#1 75.819,95.123 r180 top
R15 "1K" RESC3116X65N#1 132.461,109.728 r0 top
R16 "4.7K" RES_ERJS06J472V 142.716,61.722 r0 top
R17 "4.7K" RES_ERJS06J472V 142.716,59.563 r180 top
R18 "4.7K" RES_ERJS06J472V 118.745,54.229 r180 top
R19 "4.7K" RES_ERJS06J472V 118.745,56.261 r0 top
R20 "1K" RESC3116X65N#1 128.605,41.921 r0 top
R21 "1K" RESC3116X65N#1 132.669,43.064 r270 top
R22 "1K" RESC3116X65N#1 136.606,43.064 r270 top
R23 "1K" RESC3116X65N#1 140.716,41.921 r180 top
R26 "4.7K" RESC3116X65N#1 150.495,101.727 r0 bottom
R27 "4.7K" RESC3116X65N#1 150.495,94.996 r0 bottom
R30 "4.7K" RESC3116X65N#1 150.495,92.075 r0 bottom
R31 "4.7K" RESC3116X65N#1 150.495,85.344 r0 bottom
R34 "4.7K" RESC3116X65N#1 150.495,82.423 r0 bottom
R35 "4.7K" RESC3116X65N#1 150.495,75.692 r0 bottom
R38 "4.7K" RESC3116X65N#1 150.495,72.771 r0 bottom
R39 "4.7K" RESC3116X65N#1 150.495,66.04 r0 bottom
R40 "4.7K" RESC3116X65N#1 154.584,83.947 r180 top
R41 "4.7K" RESC3116X65N#1 154.584,75.819 r180 top
R42 "4.7K" RESC3116X65N#1 154.584,79.883 r180 top
R43 "4.7K" RESC3116X65N#1 141.166,97.663 r0 top
R44 "220" RESC3116X65N#1 138.589,88.011 r90 top
R45 "10K" RESC3116X65N#1 138.589,92.837 r90 top
R46 "4.7K" RESC3116X65N#1 141.166,84.074 r0 top
R47 "4.7K" RESC3116X65N#1 141.122,75.946 r0 top
R48 "4.7K" RESC3116X65N#1 141.166,80.01 r0 top
R49 "220" RESC3116X65N#1 130.334,77.724 r90 top
R50 "10K" RESC3116X65N#1 130.334,82.55 r90 top
R51 "4.7K" RESC3116X65N#1 154.457,92.329 r180 top
R52 "4.7K" RESC3116X65N#1 154.286,100.457 r180 top
R53 "4.7K" RESC3116X65N#1 154.33,96.393 r180 top
R54 "1K" RESC3116X65N#1 63.373,27.686 r180 top
R55 "1K" RESC3116X65N#1 63.114,76.454 r180 top
R56 "47K" RESC3116X65N#1 97.917,48.514 r270 top
R57 "47K" RESC3116X65N#1 97.917,60.833 r270 top
R58 "0.1 2W" RESC6331X80N 122.682,86.487 r90 top
R59 "0.1 2W" RESC6331X80N 101.854,43.053 r90 top
R60 "1K" RESC3116X65N#1 32.893,76.454 r180 top
R61 "1K" RESC3116X65N#1 32.893,27.686 r180 top
R62 "47K" RESC3116X65N#2 97.917,73.362 r270 top
R63 "47K" RESC3116X65N#1 97.917,36.068 r270 top
R64 "0.1 2W" RESC6331X80N 101.854,55.626 r270 top
R65 "0.1 2W" RESC6331X80N 81.788,72.263 r90 top
R66 "10K" RESC3116X65N#1 36.576,93.853 r90 top
R67 "10K" RESC3116X65N#2 36.576,88.773 r90 top
R68 "220" RES_ERJP08J221V 35.306,113.284 r90 top
R69 "220" RES_ERJP08J221V 32.639,113.284 r90 top
R70 "220" RES_ERJP08J221V 32.639,104.521 r270 top
R71 "220" RES_ERJP08J221V 32.639,91.821 r270 top
R72 "10K" RESC3116X65N#1 36.576,106.172 r90 top
R73 "10K" RESC3116X65N#1 36.576,101.092 r90 top
R74 "4.7K" RESC3116X65N#1 60.452,80.645 r270 top
R75 "10K" RESC3116X65N#1 71.247,80.137 r180 top
R76 "1K" RESC3116X65N#1 61.722,84.836 r0 top
R77 "10K" RESC3116X65N#1 71.247,82.677 r180 top
R78 "10K" RESC3116X65N#1 61.722,87.376 r0 top
R79 "4.7K" RESC3116X65N#1 60.452,91.059 r270 top
R80 "10K" RESC3116X65N#1 71.247,90.043 r180 top
R81 "10K" RESC3116X65N#1 71.247,92.583 r180 top
R82 "1K" RESC3116X65N#1 60.452,98.298 r90 top
R83 "10K" RESC3116X65N#1 58.928,101.981 r0 top
R84 "0.1 2W" RESC6331X80N 81.534,31.75 r90 top
R85 "470K" RESC3116X65N#1 101.981,85.471 r270 bottom
R86 "4.7K" RESC3116X65N#1 100.584,73.406 r90 top
R87 "100K" RESC3116X65N#2 109.22,82.804 r90 top
R88 "10" RESC3116X65N#2 117.685,87.63 r180 top
RCAN1 "120" RESC3116X65N#2 156.083,60.325 r0 top
"Relay 1" "IRLZ34N" TO-220(2) 134.525,90.043 r270 top (schematic designator J11)
"Relay 2" "IRLZ34N" TO-220(2) 134.525,78.613 r270 top (schematic designator J12)
S1 "8-1437565-1" SW_8-1437565-1 117.221,73.914 r180 top
U1 "STM32H743VIT6" QFP50P1600X1600X160-100N 131.191,58.42 r270 top
U2 "CJ125" CJ125 106.68,90.059 r270 top
U3 "2N7001TDCKR" SOT65P210X110-5N 90.678,75.875 r90 top
U4 "2N7001TDCKR" SOT65P210X110-5N 84.597,78.669 r90 top
U5 "2N7001TDCKR" SOT65P210X110-5N 87.63,75.875 r90 top
U6 "2N7001TDCKR" SOT65P210X110-5N 81.549,78.669 r90 top
U7 "MCP2562FDT-H/SN" SOIC127P600X175-8N#1 156.083,65.405 r270 top
U8 "LM2596S-3.3/NOPB" VREG_LM2596S-3.3/NOPB 85.979,121.285 r90 top
U9 "MB85RC1MTPNF-G-JNERE1" SOIC127P600X175-8N#2 103.251,28.321 r0 top
U10 "SP721ABTG" SOIC127P600X175-8N#3 147.853,79.121 r180 top
U11 "SP721ABTG" SOIC127P600X175-8N#3 147.853,95.377 r180 top
U12 "AD7997BRUZ-1REEL" SOP65P640X120-20N 148.082,70.891 r180 top
U13 "AD7997BRUZ-1REEL" SOP65P640X120-20N 148.082,87.249 r180 top
U14 "TC4424CPA" DIP254P762X432-8 47.117,90.297 r0 top
U15 "TC4424CPA" DIP254P762X432-8 47.117,102.616 r0 top
U16 "2N7001TDCKR" SOT65P210X110-5N 57.15,83.185 r0 top
U17 "MAX9924UAUB+T" *SOP50P490X110-10N 65.015,81.661 r180 top
U18 "2N7001TDCKR" SOT65P210X110-5N 57.221,88.28 r0 top
U19 "2N7001TDCKR" SOT65P210X110-5N 57.15,92.329 r0 top
U20 "MAX9924UAUB+T" *SOP50P490X110-10N 65.024,92.075 r180 top
U21 "2N7001TDCKR" SOT65P210X110-5N 57.15,97.409 r0 top
VIN "0" RESC3116X65N#1 155.575,70.612 r0 bottom (schematic designator R37)
VIN "0" RESC3116X65N#1 155.448,99.568 r0 bottom (schematic designator R25)
VIN "0" RESC3116X65N#1 155.619,89.916 r0 bottom (schematic designator R29)
VIN "0" RESC3116X65N#1 155.575,80.264 r0 bottom (schematic designator R33)
VR1 "LM2596S-5.0" TO170P1524X483-6N 123.571,117.221 r90 top
X1 "USB-B1HSB6" OST_USB-B1HSB6 150.495,27.813 r0 top
Y2 "32.768KHz" XTAL_ABS06-32.768KHZ-9-1-T 136.144,69.469 r0 top
Y3 "16MHz" XTAL_7M25090002 130.175,70.104 r270 top

## Footprints (in the part's own frame and the unit in brackets; to place one, negate y for a bottom-side part, rotate by r counter-clockwise, add the part's x,y. Pads: shape width x height; smd on the part's side, far side on the other; paste and mask are expansions set on the pad)
*SOP50P490X110-10N [mm]
  rect 1.47x0.28 smd: 1(-2.15,1) 2(-2.15,0.5) 3(-2.15,0) 4(-2.15,-0.5) 5(-2.15,-1) 6(2.15,-1) 7(2.15,-0.5) 8(2.15,0) 9(2.15,0.5) 10(2.15,1)
  silkscreen extent -3.72,-1.53 1.53,1.53
*TO254P470X1016X2019-3P [mm]
  rect 2.055x2.055 hole 1.37: 1(0,0)
  round 2.055 hole 1.37: 2(2.535,0) 3(5.07,0)
  silkscreen extent -2.8,-1.55 7.87,3.15
BEADC1608X95N [mm]
  rect 1x0.97 smd: 1(-0.735,0) 2(0.735,0)
CAP_EEEFN1E681UV [mm]
  rect 2x2 smd paste-2 mask+0: 1(-3.8,0) 2(3.8,0)
  Top Layer region: -3.15,1.25 -1.95,1.25 -1.95,-1.25 -3.15,-1.25 -3.15,-2.35 -4.45,-2.35 -4.45,-1.25 -6.35,-1.25 -6.35,1.25 -4.45,1.25 -4.45,2.35 -3.15,2.35
  Top Layer region: 4.45,1.25 6.35,1.25 6.35,-1.25 4.45,-1.25 4.45,-2.35 3.15,-2.35 3.15,-1.25 1.95,-1.25 1.95,1.25 3.15,1.25 3.15,2.35 4.45,2.35
  silkscreen extent -6.4,-5.15 5.15,5.15, body extent -5.85,-5.15 5.85,5.15, height 9.5
CAP_EEEFP1V221AV [mm]
  rect 2x2 smd paste-2 mask+0: 1(-3,0) 2(3,0)
  Top Layer region: -2.35,1.25 -1.35,1.25 -1.35,-1.25 -2.35,-1.25 -2.35,-2.35 -3.65,-2.35 -3.65,-1.25 -5.35,-1.25 -5.35,1.25 -3.65,1.25 -3.65,2.35 -2.35,2.35
  Top Layer region: 3.65,1.25 5.35,1.25 5.35,-1.25 3.65,-1.25 3.65,-2.35 2.35,-2.35 2.35,-1.25 1.35,-1.25 1.35,1.25 2.35,1.25 2.35,2.35 3.65,2.35
  silkscreen extent -4.9,-4.15 4.15,4.15, body extent -4.85,-4.15 4.85,4.15, height 10.5
CAPC1608X90N [mm]
  rect 0.92x0.98 smd: 1(-0.775,0) 2(0.775,0)
CAPPRD500W50D500H1100 [mm]
  round 1.1 hole 0.75: N(2.5,0)
  rect 1.1x1.1 hole 0.75: P(-2.5,0)
  silkscreen extent -4.06,-2.5 2.32,2.5, body extent -2.75,-2.5 2.75,2.5, height 11
CJ125 [mm]
  rect 1.8x0.6 smd: 1(0,0)
  oval 1.8x0.6 smd: 2(0,-1.27) 3(0,-2.54) 4(0,-3.81) 5(0,-5.08) 6(0,-6.35) 7(0,-7.62) 8(0,-8.89) 9(0,-10.16) 10(0,-11.43) 11(0,-12.7) 12(0,-13.97) 13(11.7,-13.97) 14(11.7,-12.7) 15(11.7,-11.43) 16(11.7,-10.16) 17(11.7,-8.89) 18(11.7,-7.62) 19(11.7,-6.35) 20(11.7,-5.08) 21(11.7,-3.81) 22(11.7,-2.54) 23(11.7,-1.27) 24(11.7,0)
  silkscreen extent 1.54,-14.6 10.17,0.64
CONN_SD-500762-001_MOL [mil]
  round 71 hole 51: A1(0,0) A2(0,-98) A3(0,-197) A4(0,-295) B1(98,0) B2(98,-98) B3(98,-197) B4(98,-295) C1(197,0) C2(197,-98) C3(197,-197) C4(197,-295) D1(295,0) D2(295,-98) D3(295,-197) D4(295,-295) E1(394,0) E2(394,-98) E3(394,-197) E4(394,-295) F1(492,0) F2(492,-98) F3(492,-197) F4(492,-295) G1(591,0) G2(591,-98) G3(591,-197) G4(591,-295) H1(689,0) H2(689,-98) H3(689,-197) H4(689,-295) J1(787,0) J2(787,-98) J3(787,-197) J4(787,-295) K1(886,0) K2(886,-98) K3(886,-197) K4(886,-295) L1(1024,0) L2(1024,-98) L3(1024,-197) L4(1024,-295) M1(1169,0) M2(1169,-98) M3(1169,-197) M4(1169,-295)
  round 161 hole 161 unplated: ""(-415,-112) ""(1585,-112)
  round 91 hole 91 unplated: ""(-254,39) ""(1423,39)
  silkscreen extent -836,-584 1966,84
DIO_BZT52C3V3_RHG [mm]
  rect 1.34x1.8 smd: A(1.43,0) C(-1.43,0)
  silkscreen extent -2.8,-0.8 0.44,0.8
DIO_SS34#1 [mm]
  rect 2x3.6 smd: A(3.4,0) C(-3.4,0)
  silkscreen extent -5.1,-2.95 3.44,2.95, body extent -3.98,-2.95 3.98,2.95, height 2.65
DIO_SS34#2 [mm]
  rect 2x3.6 smd paste+0 mask+0.102: A(3.4,0) C(-3.4,0)
  silkscreen extent -5.1,-2.95 3.44,2.95, body extent 1.05,-2.58 8.95,-0.38, height 2.8
DIOM5025X220N [mm]
  rect 2.25x1.55 smd: 1(-2,0) 2(2,0)
  silkscreen extent -2.48,-1.25 2.47,1.25, body extent -2.48,-1.25 2.47,1.25, height 2.2
DIP254P762X432-8 [mil]
  rect 59x59 / inner round 59 / far side rect 59x59 hole 39: 1(-300,300)
  round 59 hole 39: 2(-300,200) 3(-300,100) 4(-300,0) 5(0,0) 6(0,100) 7(0,200) 8(0,300)
  silkscreen extent -280,-43 -20,343, body extent -310,-34 1,340, height 200
DIP794W45P254L959H508Q8 [mm]
  rect 1.14x1.14 / inner round 1.14 / far side rect 1.14x1.14 hole 0.74: 1(-3.97,3.81)
  round 1.14 hole 0.74: 2(-3.97,1.27) 3(-3.97,-1.27) 4(-3.97,-3.81) 5(3.97,-3.81) 6(3.97,-1.27) 7(3.97,1.27) 8(3.97,3.81)
  silkscreen extent -5.3,-4.8 3.17,4.8, body extent -4.1,-4.79 4.1,4.79, height 5.08
FUSE_3522-2 [mm]
  round 3.5 hole 2.59: 1A(-7.11,0.37) 1B(-2.03,0.37) 2A(2.03,0.37) 2B(7.11,0.37)
  silkscreen extent -9.65,-2.22 9.65,2.22
HARWIN_M20-9990345 [mm]
  rect 1.605x1.605 / inner round 1.605 / far side rect 1.605x1.605 hole 1.07: 1(-2.54,0)
  round 1.605 hole 1.07: 2(0,0) 3(2.54,0)
  silkscreen extent -4.47,-1.27 3.81,1.27, body extent -1.27,-1.27 6.35,1.27, height 7.37
LEDC2012X70N [mm]
  rect 1.1x1.45 smd: A(0.9,0) C(-0.9,0)
  silkscreen extent -2.1,-0.6 0.2,0.6, body extent -1,-0.63 1,0.63, height 0.7
MOLEX_47352-1001 [mm]
  rect 0.8x1.5 smd: 1(1.94,-3.66) 2(0.84,-3.26) 3(-0.26,-3.66) 4(-1.36,-3.86) 5(-2.46,-3.66) 6(-3.56,-3.86) 7(-4.66,-3.66) 8(-5.76,-3.66)
  rect 1.3x1.4 smd: S1(-4.95,7.2) S2(0.75,7.2)
  rect 1.4x1.9 smd: S3(-6.55,-5.95) S4(6.6,-6.95)
  rect 0.95x1 smd: SW(-3.56,7.4)
  silkscreen extent -7,-7.6 7,7.6
NetTie [mil]
  rect 60x60 smd: 1(-60,-5) 2(25,-5)
  Top Layer region: -85,-35 55,-35 55,25 -85,25
OST_USB-B1HSB6 [mm]
  rect 1.428x1.428 / inner round 1.428 / far side rect 1.428x1.428 hole 0.92: 1(1.25,4.71)
  round 1.428 hole 0.92: 2(-1.25,4.71) 3(-1.25,2.71) 4(1.25,2.71)
  round 3.346 hole 2.33: P1(-6.02,0) P2(6.02,0)
  silkscreen extent -6.05,-10.3 6.05,6.2, body extent -7.42,-10.36 7.42,6.14, height 10.9
QFP50P1600X1600X160-100N [mm]
  rrect25% 1.56x0.28 smd: 1(-7.68,6) 2(-7.68,5.5) 3(-7.68,5) 4(-7.68,4.5) 5(-7.68,4) 6(-7.68,3.5) 7(-7.68,3) 8(-7.68,2.5) 9(-7.68,2) 10(-7.68,1.5) 11(-7.68,1) 12(-7.68,0.5) 13(-7.68,0) 14(-7.68,-0.5) 15(-7.68,-1) 16(-7.68,-1.5) 17(-7.68,-2) 18(-7.68,-2.5) 19(-7.68,-3) 20(-7.68,-3.5) 21(-7.68,-4) 22(-7.68,-4.5) 23(-7.68,-5) 24(-7.68,-5.5) 25(-7.68,-6) 51(7.68,-6) 52(7.68,-5.5) 53(7.68,-5) 54(7.68,-4.5) 55(7.68,-4) 56(7.68,-3.5) 57(7.68,-3) 58(7.68,-2.5) 59(7.68,-2) 60(7.68,-1.5) 61(7.68,-1) 62(7.68,-0.5) 63(7.68,0) 64(7.68,0.5) 65(7.68,1) 66(7.68,1.5) 67(7.68,2) 68(7.68,2.5) 69(7.68,3) 70(7.68,3.5) 71(7.68,4) 72(7.68,4.5) 73(7.68,5) 74(7.68,5.5) 75(7.68,6)
  rrect25% 0.28x1.56 smd: 26(-6,-7.68) 27(-5.5,-7.68) 28(-5,-7.68) 29(-4.5,-7.68) 30(-4,-7.68) 31(-3.5,-7.68) 32(-3,-7.68) 33(-2.5,-7.68) 34(-2,-7.68) 35(-1.5,-7.68) 36(-1,-7.68) 37(-0.5,-7.68) 38(0,-7.68) 39(0.5,-7.68) 40(1,-7.68) 41(1.5,-7.68) 42(2,-7.68) 43(2.5,-7.68) 44(3,-7.68) 45(3.5,-7.68) 46(4,-7.68) 47(4.5,-7.68) 48(5,-7.68) 49(5.5,-7.68) 50(6,-7.68) 76(6,7.68) 77(5.5,7.68) 78(5,7.68) 79(4.5,7.68) 80(4,7.68) 81(3.5,7.68) 82(3,7.68) 83(2.5,7.68) 84(2,7.68) 85(1.5,7.68) 86(1,7.68) 87(0.5,7.68) 88(0,7.68) 89(-0.5,7.68) 90(-1,7.68) 91(-1.5,7.68) 92(-2,7.68) 93(-2.5,7.68) 94(-3,7.68) 95(-3.5,7.68) 96(-4,7.68) 97(-4.5,7.68) 98(-5,7.68) 99(-5.5,7.68) 100(-6,7.68)
  silkscreen extent -9.54,-7 7,7, body extent -8,-8 8,8, height 1.6
RES_ERJP08J221V [mm]
  rect 1.25x1.5 smd: 1(-1.725,0) 2(1.725,0)
  silkscreen extent -0.78,-0.8 0.78,0.8
RES_ERJS06J472V [mm]
  rect 1.15x1.15 smd: 1(-1.175,0) 2(1.175,0)
  silkscreen extent -0.28,-0.62 0.28,0.62
RESC1608X50N [mm]
  rrect20% 0.94x1.02 smd: 1(-0.79,0) 2(0.79,0)
  silkscreen extent -0.8,-0.69 0.8,0.69
RESC3116X65N#1 [mm]
  rect 0.97x1.73 smd: 1(-1.48,0) 2(1.48,0)
  silkscreen extent -0.67,-0.85 0.67,0.85, body extent -1.55,-0.8 1.55,0.8, height 0.65
RESC3116X65N#2 [mm]
  rect 0.97x1.73 smd paste+0 mask+0.102: 1(-1.48,0) 2(1.48,0)
  silkscreen extent -0.67,-0.85 0.67,0.85, body extent -1.55,-0.8 1.55,0.8, height 0.65
RESC6331X80N [mm]
  rect 2.44x3.32 smd paste+0 mask+0.102: 1(-2.39,0) 2(2.39,0)
  silkscreen extent -0.85,-1.65 0.85,1.65, body extent -3.15,-1.55 3.15,1.55, height 0.8
SAMTEC_TSM-103-01-L-SH [mm]
  rect 1.27x3.18 smd: 01(-2.54,-5.28) 02(0,-5.28) 03(2.54,-5.28)
  silkscreen extent -4.56,-5.38 3.81,1.27
SAMTEC_TSM-104-01-L-MT [mm]
  rect 1.56x1.56 / inner round 1.56 / far side rect 1.56x1.56 hole 1.04: 01(3.81,0)
  rect 1.27x3.175 smd: 02(3.81,-5.511) 04(1.27,-5.511) 06(-1.27,-5.511) 08(-3.81,-5.511)
  round 1.56 hole 1.04: 03(1.27,0) 05(-1.27,0) 07(-3.81,0)
  silkscreen extent -5.08,-0.1 5.68,4.06
SAMTEC_TSM-105-01-LM-DV-P-TR [mm]
  rect 1.27x3.68 smd: 01(5.08,2.475) 02(5.08,-2.475) 03(2.54,2.475) 04(2.54,-2.475) 05(0,2.475) 06(0,-2.475) 07(-2.54,2.475) 08(-2.54,-2.475) 09(-5.08,2.475) 10(-5.08,-2.475)
  silkscreen extent -6.35,-2.54 6.35,5
SODFL3718X102N [mm]
  rect 1.08x1.09 smd: A(1.575,0) C(-1.575,0)
  silkscreen extent -3.12,-0.9 1.38,0.9, body extent -1.85,-0.9 1.85,0.9, height 1.02
SOIC127P600X175-8N#1 [mm]
  rect 1.5x0.6 smd: 1(-2.65,1.905) 2(-2.65,0.635) 3(-2.65,-0.635) 4(-2.65,-1.905) 5(2.65,-1.905) 6(2.65,-0.635) 7(2.65,0.635) 8(2.65,1.905)
  silkscreen extent -2.84,-2.45 1.58,2.64, body extent -3,-2.45 3,2.45, height 1.75
SOIC127P600X175-8N#2 [mm]
  rect 1.56x0.62 smd: 1(-2.68,1.905) 2(-2.68,0.635) 3(-2.68,-0.635) 4(-2.68,-1.905) 5(2.68,-1.905) 6(2.68,-0.635) 7(2.68,0.635) 8(2.68,1.905)
  silkscreen extent -4.4,-2.65 2.1,2.65
SOIC127P600X175-8N#3 [mm]
  rect 1.981x0.559 smd: 1(-2.464,1.905) 2(-2.464,0.635) 3(-2.464,-0.635) 4(-2.464,-1.905) 5(2.464,-1.905) 6(2.464,-0.635) 7(2.464,0.635) 8(2.464,1.905)
  silkscreen extent -1.37,-2.49 1.37,2.49
SOIC127P1041X990-8N [mm]
  rect 2.02x0.57 smd: 1(-4.68,1.905) 2(-4.68,0.635) 3(-4.68,-0.635) 4(-4.68,-1.905) 5(4.68,-1.905) 6(4.68,-0.635) 7(4.68,0.635) 8(4.68,1.905)
  silkscreen extent -6.79,-4.13 4.13,4.13
SOP65P640X120-20N [mil]
  rect 58x14 smd: 1(-111,115) 2(-111,90) 3(-111,64) 4(-111,38) 5(-111,13) 6(-111,-13) 7(-111,-38) 8(-111,-64) 9(-111,-90) 10(-111,-115) 11(111,-115) 12(111,-90) 13(111,-64) 14(111,-38) 15(111,-13) 16(111,13) 17(111,38) 18(111,64) 19(111,90) 20(111,115)
  silkscreen extent -72,-130 72,130, body extent -126,-128 126,128, height 47
SOT65P210X110-5N [mm]
  rrect25% 1.19x0.4 smd: 1(-0.96,0.65) 2(-0.96,0) 3(-0.96,-0.65) 4(0.96,-0.65) 5(0.96,0.65)
  silkscreen extent -2.2,-1.17 0.62,1.17, body extent -1.05,-1 1.05,1, height 1.1
SOT93#1 [mil]
  oval 82.5x165 hole 55: B(-215,-400) C(0,-400) E(215,-400)
  round 162 hole 162 unplated: ""(0,400)
  Keep-Out Layer circle w0: c0,400 r200
  Keep-Out Layer circle w0: c0,400 r200
  silkscreen extent -300,-320 300,575, body extent -300,-479 289,-290, height 880
SOT93#2 [mil]
  oval 82.5x165 hole 55 mask+4.02: B(-215,-400) C(0,-400) E(215,-400)
  round 162 hole 162 unplated mask+0: ""(0,400)
  Keep-Out Layer circle w0: c0,400 r200
  Keep-Out Layer circle w0: c0,400 r200
  silkscreen extent -300,-320 300,575, body extent -294,-94 294,94, height 880
SOT95P240X111-3N [mm]
  rrect25% 1.23x0.6 smd: 1(-1.06,0.95) 2(-1.06,-0.95) 3(1.06,0)
  silkscreen extent -2.35,-1.57 0.65,1.57, body extent -1.2,-1.45 1.2,1.45, height 1.11
SOT95P280X145-6N [mm]
  rect 1.2x0.6 smd: 1(-1.25,0.95) 2(-1.25,0) 3(-1.25,-0.95) 4(1.25,-0.95) 5(1.25,0) 6(1.25,0.95)
  silkscreen extent -1.85,-1.46 0.3,1.6, body extent -1.4,-1.46 1.4,1.46, height 0.4
SW_8-1437565-1 [mm]
  rect 1.7x1 smd: 1(-3.15,1.9) 2(3.15,1.9) 3(-3.15,-1.9) 4(3.15,-1.9)
  silkscreen extent -4.75,-2.72 2.45,2.72
T491A106K010AT [mm]
  rect 0.8x1.2 smd: 1(0.2,0.8) 2(3,0.8)
  silkscreen extent -0.2,-0.6 3.4,1.6, body extent -0.08,0.05 3.12,1.65, height 1.8
TE_796739-2 [mm]
  rect 1.95x1.95 hole 1.3: 1(-4.765,0)
  round 1.95 hole 1.3: 2(4.765,0)
  silkscreen extent -9.53,-7.9 9.53,5.3
TO170P1524X483-6N [mm]
  rect 3.79x0.99 smd: 1(-6.4,3.4) 2(-6.4,1.7) 3(-6.4,0) 4(-6.4,-1.7) 5(-6.4,-3.4)
  rect 7.88x10.84 smd paste-6: 6(4.35,0)
  silkscreen extent -9.1,-5.08 0.09,5.08, body extent -7.18,-5.08 7.18,5.08, height 4.65
TO228P680X240X837-3 [mm]
  rect 1.77x1.77 / inner round 1.77 / far side rect 1.77x1.77 hole 1.18: 1(0,0)
  round 1.77 hole 1.18: 2(2.28,0) 3(4.56,0)
  silkscreen extent -1.73,-0.1 5.58,1.34, body extent -1.02,-0.96 5.58,1.34, height 7.95
TO-220(2) [mil]
  oval 60x120 hole 40: GND(0,0) IN(-100,0) OUT(100,0)
  silkscreen extent -200,-100 200,100, body extent -205,-88 205,88, height 760
TVSP_SM8S36A [mm]
  rect 1.9x2.7 smd: 1(-6.8,0)
  rect 8.8x10 smd: 2(2.35,0)
  silkscreen extent -8.85,-4.25 7.75,4.25
VREG_LM2596S-3.3/NOPB [mm]
  rect 3.4x1 smd paste-0.05 mask+0.07: 1(-10.6,3.4) 2(-10.6,1.7) 3(-10.6,0) 4(-10.6,-1.7) 5(-10.6,-3.4)
  rect 8.6x10.7 smd paste-0.05 mask+0.07: 6(0,0)
  silkscreen extent -13.3,-5.08 -4.62,5.08
WE-PD_1210 [mm] "SMT Shielded Power Inductor, 2-leads, body 12x12mm"
  rect 5.4x2.9 smd: 1(0,-4.95) 2(0,4.95)
  Top Layer keep-out region: -6,6 -2.9,6 -2.9,3.3 2.9,3.3 2.9,6 6,6 6,-6 2.9,-6 2.9,-3.3 -2.9,-3.3 -2.9,-6 -6,-6
  silkscreen extent -6.25,-7.02 6.25,6.25, body extent -6,-6 6,6, height 9.46
XTAL_7M25090002 [mm]
  rect 1.2x1.4 smd: 1(-0.85,1.1) 2(-0.85,-1.1) 3(0.85,-1.1) 4(0.85,1.1)
  silkscreen extent -2.3,-0.08 1.25,1.2, body extent -1.25,-1.6 1.25,1.6, height 0.8
XTAL_ABS06-32.768KHZ-9-1-T [mm]
  rect 0.75x1.4 smd: 1(-0.725,0) 2(0.725,0)
  body extent -1,-0.6 1,0.6, height 0.61

## Part data
5V 5V 5V 5V R26 R27 R30 R31 R34 R35 R38 R39 R40 R41 R42 R43 R46 R47 R48 R51 R52 R53 VIN VIN VIN VIN: library part RC1206FR-074K7L, "4.7 kOhms Â±1% 0.25W, 1/4W Chip Resistor 1206 (3216 Metric) Moisture Resistant Thick Film", Package="3116 Yageo", Check_prices=https://www.snapeda.com/parts/RC1206FR-074K7L/Yageo/view-part/?ref=eda, MF=Yageo, MP=RC1206FR-074K7L, SnapEDA_Link=https://www.snapeda.com/parts/RC1206FR-074K7L/Yageo/view-part/?ref=snap
C1 C3 C4 C5 C6 C7 C8 C9 C11 C12 C13 C15 C16 C17 C18 C19 C20 C21 C22 C23 C24 C25 C26 C29 C30 C31 C32 C36 C37 C38 C39 C40 C41 C42 C43 C44 C45 C46 C47 C48 C49 C50 C51 C52 C53 C54 C55 C56 C57 C58 C59 C60 C61 C62 C63 C64 C65 C66 C67 C68 C69 C70 C71 C72 C73 C74 C75 C76 C77 C78 C79 C80 C81 C82 C83 C84: library part 06035C104MAZ2A, "Multilayer Ceramic Capacitors MLCC - SMD/SMT", Package=None, Availability=Unavailable, MP=06035C104MAZ2A, Price=None
C27 C35: library part EEEFN1E681UV, "CAP ALUM 680UF 20% 25V SMD", Package="RADIAL-2 Panasonic", Availability="In Stock", Check_prices=https://www.snapeda.com/parts/EEE-FN1E681UV/Panasonic/view-part/6178425/?ref=eda, MF="Panasonic Electronic Components", MP=EEE-FN1E681UV, Price=None, Purchase-URL=https://pricing.snapeda.com/search/part/EEE-FN1E681UV/?ref=eda, SnapEDA_Link=https://www.snapeda.com/parts/EEE-FN1E681UV/Panasonic/view-part/6178425/?ref=snap
C28 C33: library part EEEFP1V221AV, "CAP ALUM 220UF 20% 35V SMD", Package="RADIAL-2 Panasonic", Availability="Not in stock", Check_prices=https://www.snapeda.com/parts/EEE-FP1V221AV/Panasonic/view-part/4900934/?ref=eda, MF="Panasonic Electronic Components", MP=EEE-FP1V221AV, Price=None, SnapEDA_Link=https://www.snapeda.com/parts/EEE-FP1V221AV/Panasonic/view-part/4900934/?ref=snap
C34: library part ECEA1EN100UB, "10ÂµF 25V Aluminum Electrolytic Capacitors Radial, Can 2000 Hrs @ 85Â°C", Package="RADIAL-2 Panasonic", Availability="In Stock", Check_prices=https://www.snapeda.com/parts/ECEA1EN100UB/Panasonic/view-part/?ref=eda, MF=Panasonic, MP=ECEA1EN100UB, Price=None, Purchase-URL=https://pricing.snapeda.com/search/part/ECEA1EN100UB/?ref=eda, SnapEDA_Link=https://www.snapeda.com/parts/ECEA1EN100UB/Panasonic/view-part/?ref=snap
D1 D28 D29: "200W, 6.7V, 5%, Unidirectional, TVS", Package="SOD-123W-2 Taiwan Semiconductor", Check_prices=https://www.snapeda.com/parts/SMF5.0A/taiwan/view-part/?ref=eda, MF="Taiwan Semiconductor", MP=SMF5.0A, SnapEDA_Link=https://www.snapeda.com/parts/SMF5.0A/taiwan/view-part/?ref=snap
D2 D3 D8 D9 D10 D11 D16 D18 D22 D24: library part 597-3305-607F, "LED Uni-Color Green 4-Pin Chip 0805 T/R", Package=None, Availability=Unavailable, MP=597-3305-607F, Price=None
D4 D5 D7 D17 D19 D20 D21 D23 D25 D26 D27: "3A, 40V, Schottky Rectifier", Package="DO-214AB-2 Taiwan Semiconductor", MF="Taiwan Semiconductor", MP=SS34
  D4 D5 D17 D19 D20 D21 D23 D25 D26 D27: Check_prices=https://www.snapeda.com/parts/SS34/Taiwan+Semiconductor/view-part/?ref=eda, SnapEDA_Link=https://www.snapeda.com/parts/SS34/Taiwan+Semiconductor/view-part/?ref=snap
  D7: Check_prices=https://www.snapeda.com/parts/SS34/taiwan/view-part/?ref=eda, SnapEDA_Link=https://www.snapeda.com/parts/SS34/taiwan/view-part/?ref=snap
D6 D13 D15 J8 J10 S1 U8: Package=None, Availability=Unavailable, Price=None
  D6: MP=SM8S36A
  D13 D15: MP=BZT52C3V3_RHG
  J8: MF="Samtec Inc.", MP=TSM-103-01-L-SH
  J10: MP=5007620483
  S1: MP=8-1437565-1
  U8: MP=LM2596S-3.3/NOPB
D12 D14 D30: "Diode Schottky 40 V 5A Surface Mount DO-214AC (SMA)", Package="DO-214AC-214 Comchip Technology", Check_prices=https://www.snapeda.com/parts/SS54-HF/Comchip/view-part/?ref=eda, MF="Comchip Technology", MP=SS54-HF, SnapEDA_Link=https://www.snapeda.com/parts/SS54-HF/Comchip/view-part/?ref=snap
D31: "17V Clamp 5A (8/20µs) Ipp Tvs Diode Surface Mount SOT-23-6", Package="SOT-23-6 STMicroelectronics", Check_prices=https://www.snapeda.com/parts/USBLC6-2SC6Y/STMicroelectronics/view-part/?ref=eda, MF=STMicroelectronics, MP=USBLC6-2SC6Y, SnapEDA_Link=https://www.snapeda.com/parts/USBLC6-2SC6Y/STMicroelectronics/view-part/?ref=snap
FL FL1 FL2: library part BLM18DN601SZ1D, "600 Ohms @ 100MHz 1 Ferrite Bead 0603 _1608 Metric_ 700mA", Package="1608 Murata", Availability=Unavailable, MF=Murata, MP=BLM18DN601SZ1D, Price=None, SnapEDA_Link=https://www.snapeda.com/parts/BLM18DN601SZ1D/Murata/view-part/4302620/?ref=snap
FUSE: library part 3522-2, Package=None, Availability=Unavailable, MF="{'manufacturer': u'Keystone Electronics'}", MP=3522-2, Price=None
J2: library part T491A106K010AT, "Condensador electrolÃ­tico de tantalio sÃ³lido MnO2 de 10 ÂµF, 10 V CC +/-10 %, serie T491", Package="SMD-2 KEMET", Check_prices=https://www.snapeda.com/parts/T491A106K010AT/KEMET/view-part/?ref=eda, MF=KEMET, MP=T491A106K010AT, SnapEDA_Link=https://www.snapeda.com/parts/T491A106K010AT/KEMET/view-part/?ref=snap
J3: library part 796739-2, "Conn Terminal Block F 2 POS 9.53mm Solder RA Thru-Hole 32A/Contact", Package=None, Availability=Unavailable, Centerline_Pitch="9.53 mm[.375 in]", EU_RoHS_Compliance="Compliant with Exemptions", MF="TE Connectivity", MP=796739-2, Number_of_Positions=2, Price=None, SnapEDA_Link=https://www.snapeda.com/parts/796739-2/TE%20Connectivity%20AMP%20Connectors/view-part/279084/?ref=snap, TE_purchase_URL=https://www.te.com/usa-en/product-796739-2.html?te_bu=Cor&te_type=disp&te_campaign=seda_glo_cor-seda-global-disp-prtnr-fy19-seda-model-bom-cta_sma-317_1&elqCampaignId=32493
J5: "TSM Series .100 Surface Mount Terminal Strip", Package=None, Check_prices=https://www.snapeda.com/parts/TSM-104-01-L-MT/Samtec/view-part/?ref=eda, MF=Samtec, MP=TSM-104-01-L-MT, SnapEDA_Link=https://www.snapeda.com/parts/TSM-104-01-L-MT/Samtec/view-part/?ref=snap
J7: "8 (6 + 2) Position Card Connector Secure Digital - microSDâ„¢ Surface Mount, Right Angle Gold", Package=None, Availability="In Stock", MF=Molex, MP=473521001, Price=None, Purchase-URL=https://pricing.snapeda.com/search/part/473521001/?ref=eda
J9: "TSM - Samtec 2.54mm Dual Row Vertical Surface Mount Header 5.84mm Post Height (01) - Fast Stock", Package=None, Availability="In Stock", Check_prices=https://www.snapeda.com/parts/TSM-105-01-LM-DV-P-TR/Samtec/view-part/3284031/?ref=eda, MF=Samtec, MP=TSM-105-01-LM-DV-P-TR, Price=None, Purchase-URL=https://pricing.snapeda.com/search/part/TSM-105-01-LM-DV-P-TR/?ref=eda, SnapEDA_Link=https://www.snapeda.com/parts/TSM-105-01-LM-DV-P-TR/Samtec/view-part/3284031/?ref=snap
J13 J14: "2.54mm (0.1) Pitch SIL Vertical Throughboard Pin Header, 6.1mm mating pin height, gold (hi-temp mould), 3 contacts", Package=None, Check_prices=https://www.snapeda.com/parts/M20-9990345/Harwin+Inc./view-part/?ref=eda, MF=Harwin, MP=M20-9990345, SnapEDA_Link=https://www.snapeda.com/parts/M20-9990345/Harwin+Inc./view-part/?ref=snap
L1 L2: library part 7447709330, "WE-PD SMT Power Inductor, size 1210, 33uH, 4.2A, 45mOhm", Case/Size Code=1210, DC Resistance=37mOhm, DC Resistance Max=45mOhm, Inductance=33uH, Manufacturer="Wurth Elektronik", Operating Temperature Max=125°C, Operating Temperature Min=-40°C, Rated Current=4.2A, Saturation Current=5.5A, Self Resonant Frequency=8.5MHz, Category="Power Inductors", ComponentLink1Description="Website Link", ComponentLink1URL=https://www.we-online.com/redexpert/article/7447709330?ad, ComponentLink2Description="Datasheet Link", ComponentLink2URL=https://www.we-online.com/redexpert/spec/7447709330?ad, Height=10mm, Length=12mm, Manufacturer Part Number=7447709330, Match Code=WE-PD, Mount="Surface Mount", Packaging="Tape and Reel", Type=Standard, Width=12mm
"LAMB HEATER": "650V, 4A, Single N-Channel Power MOSFET", Package="TO-251 Taiwan Semiconductor", Check_prices=https://www.snapeda.com/parts/TSM4NB65CH%20C5G/Taiwan+Semiconductor/view-part/?ref=eda, MF="Taiwan Semiconductor", MP="TSM4NB65CH C5G", SnapEDA_Link=https://www.snapeda.com/parts/TSM4NB65CH%20C5G/Taiwan+Semiconductor/view-part/?ref=snap
LM1 LM2 LM3 LM4: library part Component_1
NT1: library part NT
Q2 Q3 Q4 Q5: "N-Channel 50 V 220mA (Ta) 350mW (Ta) Surface Mount SOT-23-3", Package="SOT-23-3 ON Semiconductor", Check_prices=https://www.snapeda.com/parts/BSS138/Onsemi/view-part/?ref=eda, MF=onsemi, MP=BSS138, SnapEDA_Link=https://www.snapeda.com/parts/BSS138/Onsemi/view-part/?ref=snap
Q6 Q7 Q8 Q9: "Bipolar (BJT) Transistor NPN - Darlington 100 V 10 A - 125 W Through Hole TO-247-3", Package="SOT-93-3 ON Semiconductor", Check_prices=https://www.snapeda.com/parts/TIP142/Onsemi/view-part/?ref=eda, MF="ON Semiconductor", MP=TIP142, SnapEDA_Link=https://www.snapeda.com/parts/TIP142/Onsemi/view-part/?ref=snap
R1 R3 R4 R5 R6 R7 R8 R9 R11 R12 R13 R44 R45 R49 R50 R56 R57 R62 R63 R66 R67 R72 R73 R74 R75 R76 R77 R78 R79 R80 R81 R82 R83 R85 R86 R87 R88 RCAN1: library part AA1206JR-07470RL, Package=None, Availability=Unavailable, MP=AA1206JR-07470RL, Price=None
R2 R10: library part RP73PF1J10KBTDF, "Thin Film Resistors - SMD 10K OHM .1% 25PPM", Package=0603, Power_Rating=".166 W", Tolerance=.1%, Voltage_Rating="75 V", Digi-Key_Part_Number=A110204CT-ND, MF="TE Connectivity", Mouser-Purchase-URL=https://snapeda.com/shop?store=Mouser&id=550687, MP=RP73PF1J10KBTDF, Resistance=10K, SnapEDA_Link=https://www.snapeda.com/parts/RP73PF1J10KBTDF/TE%20Connectivity%20Passive%20Product/view-part/550687/?ref=snap
R14 R15 R20 R21 R22 R23 R54 R55 R60 R61: library part RC1206JR-071KL, "RES, THICK FILM, 1K, 5%, 0.25W, 1206; Resistance:1kohm; Resistance Tolerance:Â± 5%; Power Rating:250mW; Resistor Case Style:1206 ^3216 Metric]; Resistor Technology:Thick Film; Resistor Type:General Purpose; Product Range:RC Series", Package="1206-2 YAGEO", Check_prices=https://www.snapeda.com/parts/RC1206JR071KL/Yageo/view-part/?ref=eda, MF="Yageo Corporation", MP=RC1206JR071KL, SnapEDA_Link=https://www.snapeda.com/parts/RC1206JR071KL/Yageo/view-part/?ref=snap
R16 R17 R18 R19: library part ERJS06J472V, Package=None, Availability=Unavailable, MP=ERJS06J472V, Price=None
R58 R59 R64 R65 R84: library part CRM2512-JX-R100ELF, "Resistor,Thick Film,Res 0.1 Ohms,Pwr-Rtg 2 W,Tol 5%,SMT,2512", Package="6331 Bourns", Check_prices=https://www.snapeda.com/parts/CRM2512-JX-R100ELF/Bourns/view-part/?ref=eda, MF=Bourns, MP=CRM2512-JX-R100ELF, SnapEDA_Link=https://www.snapeda.com/parts/CRM2512-JX-R100ELF/Bourns/view-part/?ref=snap
R68 R69 R70 R71: library part ERJP08J221V, Package=None, Availability=Unavailable, MP=ERJP08J221V, Price=None
"Relay 1" "Relay 2": "N-Channel 55 V 30A (Tc) 3.8W (Ta), 68W (Tc) Surface Mount D2PAK", Package="TO-220 Infineon", Check_prices=https://www.snapeda.com/parts/IRLZ34N/Infineon/view-part/?ref=eda, MF=Infineon, MP=IRLZ34N, SnapEDA_Link=https://www.snapeda.com/parts/IRLZ34N/Infineon/view-part/?ref=snap
U1: "ARMÂ® CortexÂ®-M7 STM32H7 Microcontroller IC 32-Bit Single-Core 480MHz 2MB (2M x 8) FLASH 100-LQFP (14x14)", Package="LQFP-100 STMicroelectronics", Check_prices=https://www.snapeda.com/parts/STM32H743VIT6/STMicroelectronics/view-part/?ref=eda, MF=STMicroelectronics, MP=STM32H743VIT6, SnapEDA_Link=https://www.snapeda.com/parts/STM32H743VIT6/STMicroelectronics/view-part/?ref=snap
U3 U4 U5 U6 U16 U18 U19 U21: "1-bit dual-supply buffered voltage signal converter", Package="SC70-5 Texas Instruments", Check_prices=https://www.snapeda.com/parts/2N7001TDCKR/Texas+Instruments/view-part/?ref=eda, MF="Texas Instruments", MP=2N7001TDCKR, SnapEDA_Link=https://www.snapeda.com/parts/2N7001TDCKR/Texas+Instruments/view-part/?ref=snap
U7: "CAN Flexible Data Rate Transceiver", Package="SO-8 Microchip", Check_prices=https://www.snapeda.com/parts/MCP2562FDT-H/SN/Microchip/view-part/?ref=eda, MF=Microchip, MP=MCP2562FDT-H/SN, SnapEDA_Link=https://www.snapeda.com/parts/MCP2562FDT-H/SN/Microchip/view-part/?ref=snap
U9: "FRAM _Ferroelectric RAM_ Memory IC 1Mb _128K x 8_ IÂ²C 3.4MHz 130ns 8-SOP", Package="SO-8 Fujitsu", Availability=Unavailable, MF="Fujitsu Electronics", MP=MB85RC1MTPNF-G-JNERE1, Price=None, SnapEDA_Link=https://www.snapeda.com/parts/MB85RC1MTPNF-G-JNERE1/Fujitsu%20Electronics%20America%2C%20Inc./view-part/2842124/?ref=snap
U10 U11: "TVS Diode Arrays", Package=None, Availability=Unavailable, MP=SP721ABTG, Price=None
U12 U13: "Adc, 10-Bit, 188Ksps, Tssop-20; Resolution (Bits):10Bit; Sampling Rate:188Ksps; Input Channel Type:Single Ended; Data Interface:2 Wire, I2C; Supply Voltage Type:Single; Supply Voltage Min:2.7V; Supply Voltage Max:5.5V Rohs Compliant: Yes", Package=None, Check_prices=https://www.snapeda.com/parts/AD7997BRUZ1/Analog+Devices/view-part/?ref=eda, MF="Analog Devices", MP=AD7997BRUZ1, SnapEDA_Link=https://www.snapeda.com/parts/AD7997BRUZ1/Analog+Devices/view-part/?ref=snap
U14 U15: "Dual MOSFET Power Driver 3A 4.5 to 18V Non-Inverting 8-Pin PDIP", Package="DIP-8 Microchip", Check_prices=https://www.snapeda.com/parts/TC4424CPA/Microchip/view-part/?ref=eda, MF=Microchip, MP=TC4424CPA, SnapEDA_Link=https://www.snapeda.com/parts/TC4424CPA/Microchip/view-part/?ref=snap
VR1: "SIMPLE SWITCHER&reg; 4.5V to 40V, 3A Low Component Count Step-Down Regulator", Package="TO-263-5 Texas Instruments", Availability="In Stock", Check_prices=https://www.snapeda.com/parts/LM2596S-5.0/NOPB/Texas+Instruments/view-part/?ref=eda, MF="Texas Instruments", MP=LM2596S-5.0/NOPB, Price=None, Purchase-URL=https://pricing.snapeda.com/search/part/LM2596S-5.0/NOPB/?ref=eda, SnapEDA_Link=https://www.snapeda.com/parts/LM2596S-5.0/NOPB/Texas+Instruments/view-part/?ref=snap
X1: "USB-B (USB TYPE-B) - Receptacle Connector 4 Position Through Hole, Right Angle", Package=None, Availability="In Stock", Check_prices=https://www.snapeda.com/parts/USB-B1HSB6/On+Shore+Technology+Inc./view-part/?ref=eda, MF="On Shore", MP=USB-B1HSB6, Price=None, Purchase-URL=https://pricing.snapeda.com/search/part/USB-B1HSB6/?ref=eda, SnapEDA_Link=https://www.snapeda.com/parts/USB-B1HSB6/On+Shore+Technology+Inc./view-part/?ref=snap
Y2: library part ABS06-32.768KHZ-9-1-T, "32.768 kHz Â±10ppm Crystal 9pF 90 kOhms 2-SMD, No Lead", Package="SMD-2 Abracon LLC", Availability="In Stock", Check_prices=https://www.snapeda.com/parts/ABS06-32.768KHZ-9-1-T/Abracon+LLC/view-part/?ref=eda, MF=Abracon, MP=ABS06-32.768KHZ-9-1-T, Price=None, Purchase-URL=https://pricing.snapeda.com/search/part/ABS06-32.768KHZ-9-1-T/?ref=eda, SnapEDA_Link=https://www.snapeda.com/parts/ABS06-32.768KHZ-9-1-T/Abracon+LLC/view-part/?ref=snap
Y3: library part 7M25090002, "25 MHz Â±10ppm Crystal 18pF 4-SMD, No Lead", Package="SMD-4 TXC", Availability="In Stock", Check_prices=https://www.snapeda.com/parts/7M25090002/TXC/view-part/?ref=eda, MF=TXC, MP=7M25090002, Price=None, Purchase-URL=https://pricing.snapeda.com/search/part/7M25090002/?ref=eda, SnapEDA_Link=https://www.snapeda.com/parts/7M25090002/TXC/view-part/?ref=snap
Q10 Q11 Q12 Q13: Check_prices=https://www.snapeda.com/parts/ISL9V5036P3-F085/Onsemi/view-part/?ref=eda, SnapEDA_Link=https://www.snapeda.com/parts/ISL9V5036P3-F085/Onsemi/view-part/?ref=snap
U17 U20: Check_prices=https://www.snapeda.com/parts/MAX9924UAUB+T/Maxim+Integrated/view-part/?ref=eda, SnapEDA_Link=https://www.snapeda.com/parts/MAX9924UAUB+T/Maxim+Integrated/view-part/?ref=snap

## Free pads (board coordinates)
  round 8 hole 4: 7(52.07,32.512) 7(84.582,87.376) 7(172.72,31.115) 7(172.72,121.285)

## Via types
v1: diameter 0.5, hole 0.3, Top Layer to Bottom Layer, 142 vias
v2: diameter 0.8, hole 0.3, Top Layer to Bottom Layer, 59 vias
v3: diameter 2.2, hole 1.2, Top Layer to Bottom Layer, 31 vias
v4: diameter 2, hole 0.8, Top Layer to Bottom Layer, 6 vias
v5: diameter 1, hole 0.4, Top Layer to Bottom Layer, 3 vias